# Allegro board MB1136_BOOSTPACK_V10A.brd
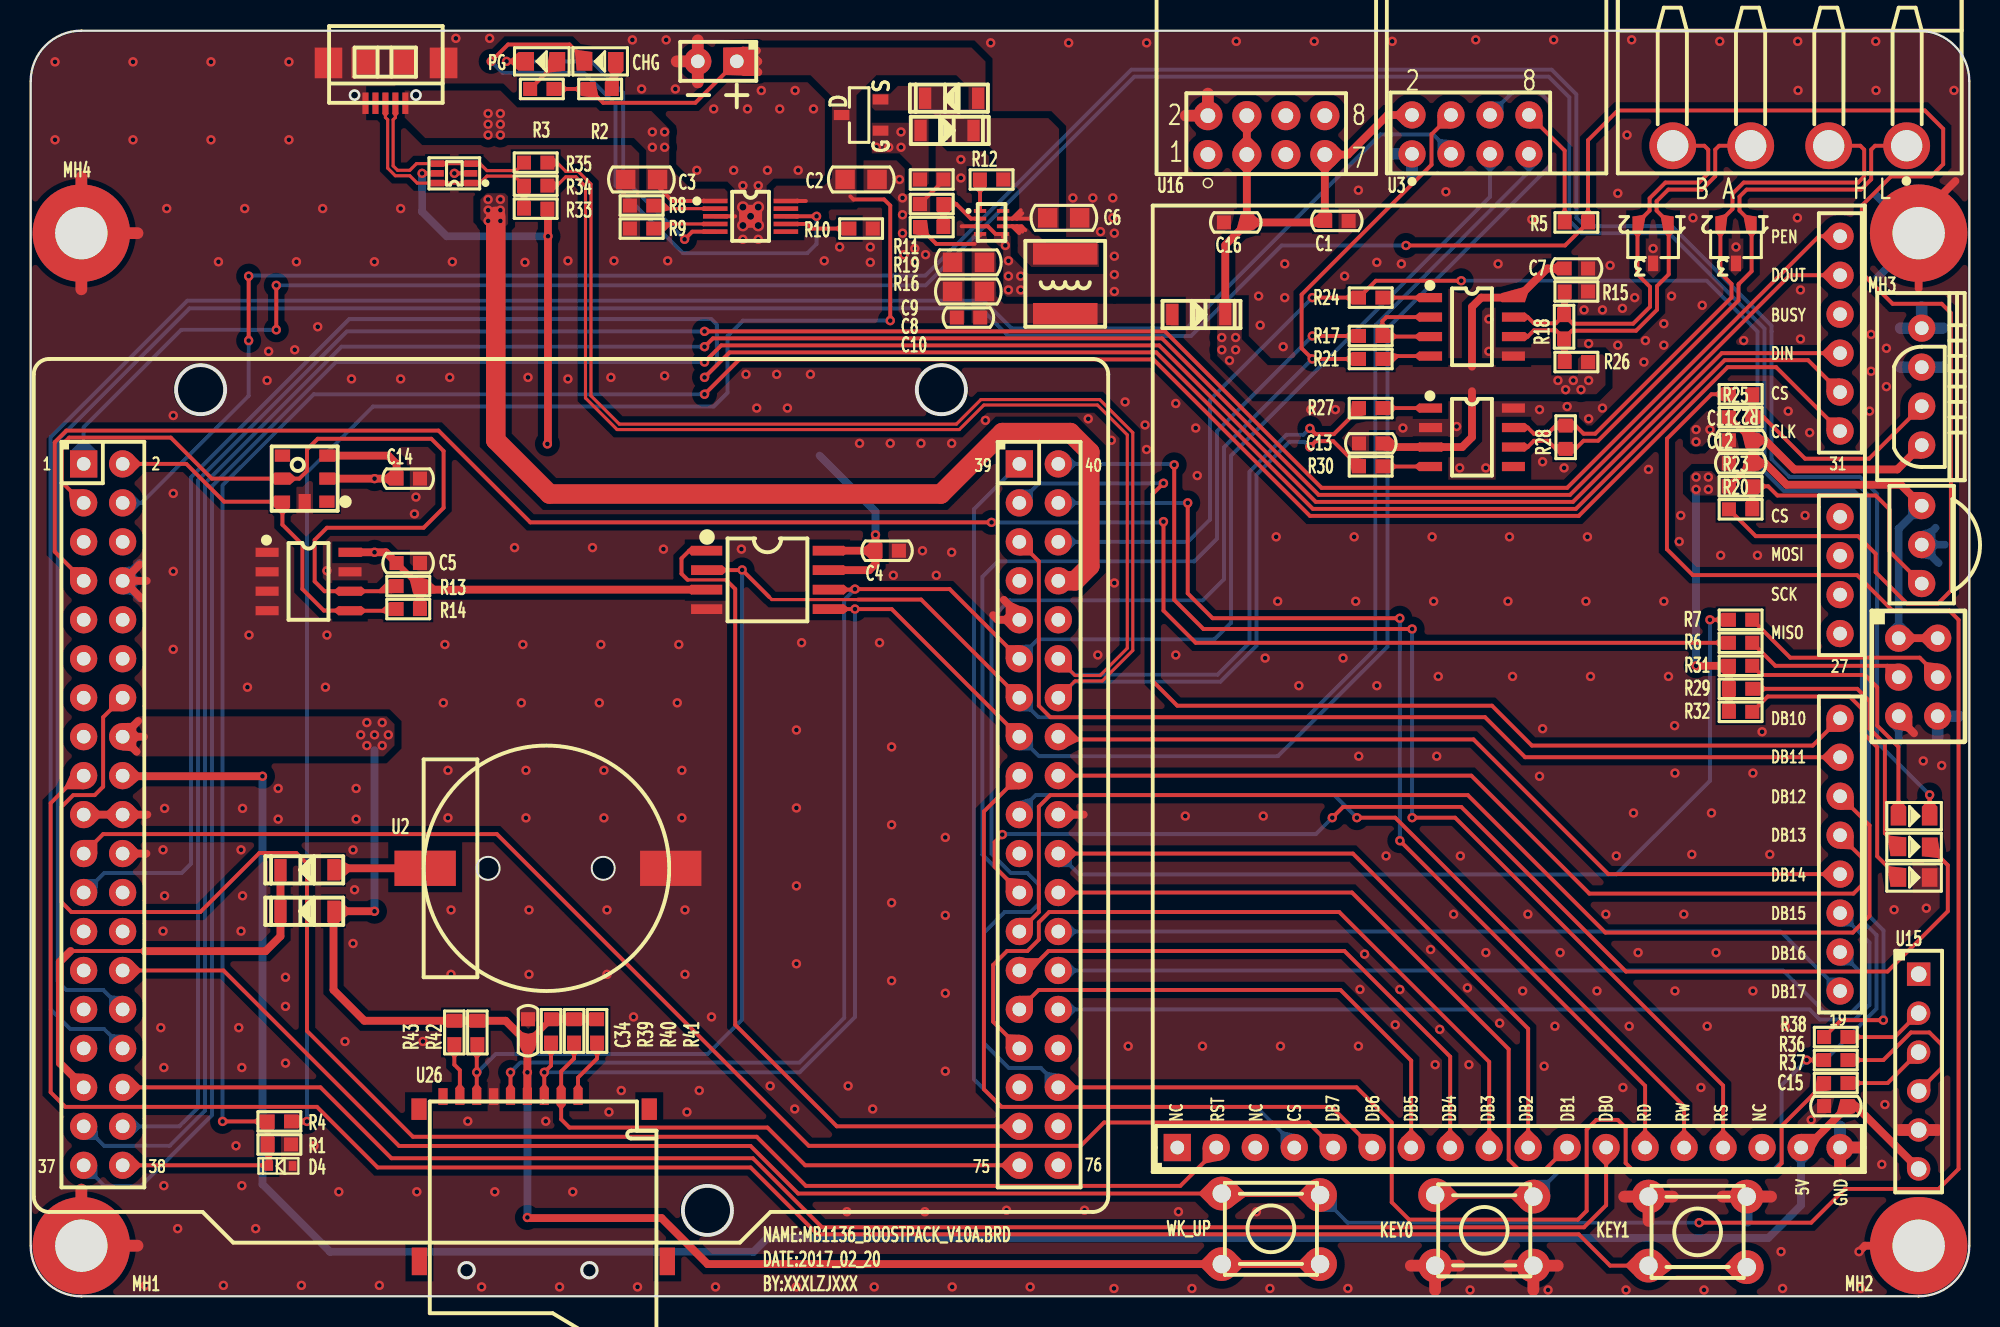
[diagram p0: board, top side]
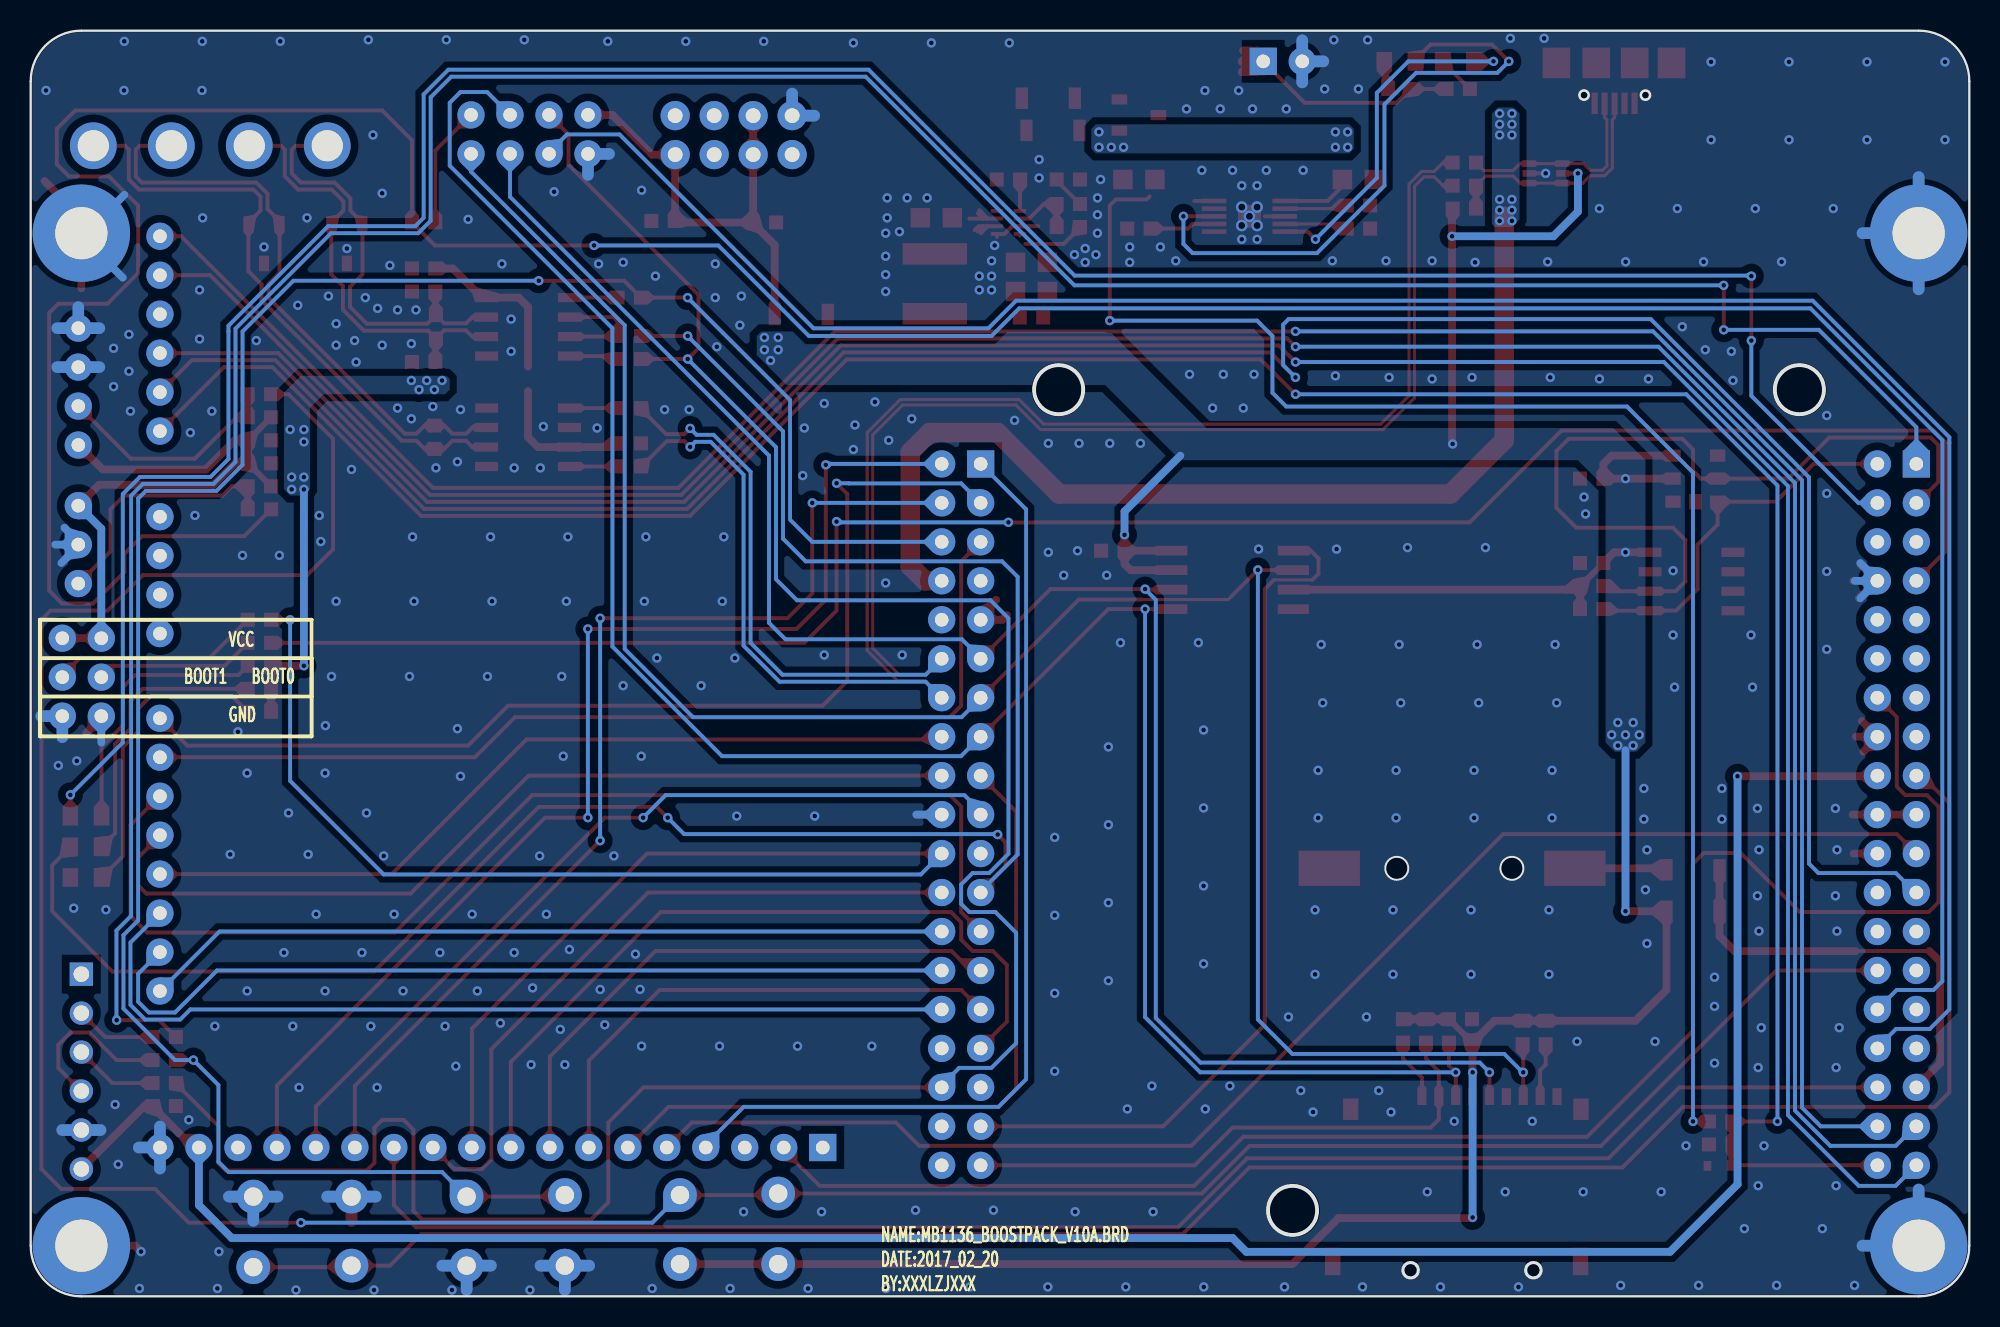
[diagram p1: board, bottom side, seen from below]

Outline 126.3 x 82.5 mm; copper layers: TOP, BOTTOM. Coordinates in mm from the lower left corner of the outline.
Outline path: 0,79.2 0,3.3 arc(0.97,0.97) 3.3,0 123,0 arc(125.33,0.97) 126.3,3.3 126.3,79.2 arc(125.33,81.53) 123,82.5 3.3,82.5 arc(0.97,81.53) 0,79.2

## Design rules (mm)
net group CAN-DP1: nets CAN_RX CAN_TX
net group DP1: nets 485_A 485_B
net group DP2: nets CAN_H CAN_L
net group USB-DP0: nets N16769643 N16789003
nets with their own width: min track width 0.254; nets VCC_5V

## Placement (name value [footprint] x y rotation side)
BAT1  BATTERY  [HEADER2X1_2R54]  46 80.5 180 top
C1  0.1uF_50V  [CC0603]  85.1 70.1 180 top
C2  10uF_25V  [CC0805]  54.1 72.8 0 top
C3  10uF_25V  [CC0805]  39.8 72.8 180 top
C4  0.1uF_50V  [CC0603]  55.8 48.6 180 top
C5  0.1uF_50V  [CC0603]  24.6 47.8 180 top
C6  10uF_25V  [CC0805]  67.3 70.3 0 top
C7  0.1uF_50V  [CC0603]  100.7 67 0 top
C8  10uF_25V  [CC0805]  61.1 65.5 180 top
C9  10uF_25V  [CC0805]  61.1 67.4 180 top
C10  0.1uF_50V  [CC0603]  61.1 63.8 180 top
C11  0.1uF_50V  [CC0603]  111.4 55.8 0 top
C12  0.1uF_50V  [CC0603]  111.4 54.3 0 top
C13  0.1uF_50V  [CC0603]  87.3 55.6 0 top
C14  0.1uF_50V  [CC0603]  24.6 53.3 180 top
C15  0.1uF_50V  [CC0603]  117.6 12.4 0 top
C16  0.1uF_50V  [CC0603]  78.5 70 0 top
C34  0.1uF_50V  [CC0603]  32.4 17.3 90 top
D1  MBR0520_SOD123  [SOD123]  19.6 25.1 180 top
D2  MBR0520_SOD123  [SOD123]  19.6 27.8 180 top
D3  LED_RED  [LED0805]  37.1 80.5 180 top
D4  PESD3V3SIUB  [SOD523]  16.3 8.5 0 top
D5  LED_GREEN  [LED0805]  33.3 80.5 180 top
D6  LMBR120FT1G_SOD-123  [SOD-123]  61.6 78.1 180 top
D7  LMBR120FT1G_SOD-123  [SOD-123]  58.1 76 0 top
D8  LMBR120FT1G_SOD-123  [SOD-123]  74.5 64 0 top
D9  LED_RED  [LED0805]  122.7 29.3 0 top
D10  LED_RED  [LED0805]  122.7 31.3 0 top
D11  LED_RED  [LED0805]  122.7 27.3 0 top
J1  -  [HEADER3X2_2R54]  121.7 42.9 270 top
J2  WJ2EDGRC-5.08-4P  [WJ2EDGRC-5R08-4P]  114.6 75 180 top
L1  SWPA5020S1R5MT  [L5020]  67.4 66 270 top
MH1  Hold  [HOLD250D134]  3.3 3.3 0 top
MH2  Hold  [HOLD250D134]  123 3.3 0 top
MH3  Hold  [HOLD250D134]  123 69.3 0 top
MH4  Hold  [HOLD250D134]  3.3 69.3 0 top
NOREF  -  []  0 5.7 0 top
NOREF#2  -  []  8.2 0 90 top
Q1  AO3401A_SOT23_PMOS  [SOT23_GSD]  54.1 77 90 top
R1  200K  [RC0603]  16.2 9.9 180 top
R2  1.5K  [RC0603]  37.1 78.7 180 top
R3  1.5K  [RC0603]  33.3 78.7 0 top
R4  200K  [RC0603]  16.2 11.4 0 top
R5  1K  [RC0603]  100.7 70 180 top
R6  10K  [RC0603]  111.4 42.6 0 top
R7  10K  [RC0603]  111.4 44.1 180 top
R8  1K  [RC0603]  39.8 71.1 180 top
R9  2K  [RC0603]  39.8 69.6 180 top
R10  10K  [RC0603]  54.1 69.6 0 top
R11  100K  [RC0603]  58.7 72.8 0 top
R12  0R  [RC0603]  62.6 72.8 180 top
R13  4.7K  [RC0603]  24.6 46.3 180 top
R14  4.7K  [RC0603]  24.6 44.8 180 top
R15  4.7K  [RC0603]  100.7 65.5 0 top
R16  200K  [RC0603]  58.7 69.7 0 top
R17  0R/NI  [RC0603]  87.3 62.6 180 top
R18  120R  [RC0603]  99.9 63.2 90 top
R19  44.2K  [RC0603]  58.7 71.2 180 top
R20  0R/NI  [RC0603]  111.4 51.3 0 top
R21  0R/NI  [RC0603]  87.3 61.1 180 top
R22  0R/NI  [RC0603]  111.4 58.8 180 top
R23  4.7K  [RC0603]  111.4 52.8 0 top
R24  0R/NI  [RC0603]  87.3 65.1 180 top
R25  4.7K  [RC0603]  111.4 57.3 0 top
R26  4.7K  [RC0603]  100.7 60.9 180 top
R27  0R/NI  [RC0603]  87.3 57.9 180 top
R28  120R  [RC0603]  100 56 90 top
R29  510R  [RC0603]  111.4 39.6 0 top
R30  0R/NI  [RC0603]  87.3 54.1 180 top
R31  510R  [RC0603]  111.4 41.1 0 top
R32  510R  [RC0603]  111.4 38.1 0 top
R33  1.5K  [RC0603]  32.9 70.9 180 top
R34  22R  [RC0603]  32.9 72.4 180 top
R35  22R  [RC0603]  32.9 73.9 180 top
R36  0R/NI  [RC0603]  117.6 15.4 0 top
R37  0R/NI  [RC0603]  117.6 13.9 0 top
R38  0R/NI  [RC0603]  117.6 16.9 0 top
R39  4.7K  [RC0603]  33.9 17.3 90 top
R40  4.7K  [RC0603]  35.4 17.3 90 top
R41  4.7K  [RC0603]  36.9 17.3 90 top
R42  4.7K  [RC0603]  29.1 17.2 270 top
R43  4.7K  [RC0603]  27.6 17.2 270 top
SW1  KEY  [SW-6X6X6]  80.8 4.4 90 top
SW2  KEY  [SW-6X6X6]  94.7 4.3 90 top
SW3  KEY  [SW-6X6X6]  108.6 4.2 270 top
TFT1  2.4TFT  [TFT_2_4]  73.1 8.1 0 top
U1  -  [NUCLEO-F446RE]  0.2 61.1 0 top
U2  BATTERY  [CR1220]  33.7 27.9 180 top
U3  -  [NRF24L01PACK]  95.45 85.57 0 top
U4  BQ24090DGQR  [HVSSOP-10]  46.9 70.4 270 top
U5  W25Q128FVSIG  [SOIC-8_208]  48 46.7 270 top
U6  MP2162GQH-Z  [QFN-8]  62.6 70 0 top
U7  AT24C512C-SSHM-T  [SOIC8]  18.1 46.6 270 top
U8  DHT11&DS18B20  [DHT11]  123.2 59.3 90 top
U9  -  [HS0038B]  123.2 49 90 top
U10  MAX3485ESA  [SOIC8]  93.9 63.2 270 top
U11  PESD1CAN  [SOT23-3]  105.7 68.6 180 top
U12  SN65HVD230DR  [SOIC8]  93.9 56 270 top
U13  PESD1CAN  [SOT23-3]  111.1 68.6 180 top
U14  -  [BMP180]  19.3 51.8 90 top
U15  ATK MODULE  [ATK-MODULE]  123 21 270 top
U16  -  [ESP8266PACK]  76.69 74.42 0 top
U25  NUP4202W1T2G  [SOT-363]  27.6 73.2 90 top
U26  -  [TFCARD]  33.4 12.7 0 top
USB1  -  [USB-MICRO]  23.1 77.7 180 top

## Library data of the parts
BAT1 U2 = BATTERY
C1 C4 C5 C7 C10-C16 C34 = CAP NP
C2 C3 C6 C8 C9 = CAP NP_2
D1 D2 D6-D8 = DIODE13_0
D3 D5 D9-D11 = LED_4
D4 = PESD3V3S1UB_1
J1 = CONN RCPT 3x2
J2 = WJ2EDGRC-5.08-4P
L1 = IND_BEAD_0805_600OHM_1
MH1-MH4 = Hold_1
Q1 = MOS-P
R1-R4 R6-R43 = R_Generic
R5 = R_10k_0603
SW1-SW3 = SWITCH-SPST-4P
TFT1 = 2_1.4TFT
U1 = NUCLEO-F446RE
U3 = NRF24L01PACK
U4 = BQ24090
U5 = W25Qxx
U6 = MP2162GQH-Z
U7 = AT24C512
U8 = DHT11_0
U9 = HS0038
U10 = MAX3485ESA
U11 U13 = PESD1CAN
U12 = TJA1050
U14 = BMP180
U15 = ATK MODULE
U16 = ESP8266PACK
U25 = nup2202w1_D_2
U26 = TFCARD_1
USB1 = USB-MICRO

## Footprints (pads in the part's own frame, mm; a bottom-side part is the same pattern mirrored in y, then rotated)
ATK-MODULE
  rect 1.524x1.524 hole 1.016: 1(0,0)
  round 1.524 hole 1.016: 2(2.54,0) 3(5.08,0) 4(7.62,0) 5(10.16,0) 6(12.7,0)
BMP180
  rect 0.8x1 smd: 1(0,0) 2(1.5,0) 3(3,0) 4(3,2.9) 5(1.5,2.9) 6(0,2.9)
  rect 1x0.8 smd: 7(0,1.45)
CC0603
  rect 0.914x0.914 smd: 1(-0.762,0) 2(0.762,0)
CC0805
  rect 1.27x1.27 smd: 1(-1.041,0) 2(1.041,0)
CR1220
  rect 4x2.3 smd: 1(8,0) 2(-8,0)
DHT11
  round 1.778 hole 0.889: 1(-3.81,0) 2(-1.27,0) 3(1.27,0) 4(3.81,0)
ESP8266PACK
  round 1.905 hole 0.965: 1(0,0) 2(0,2.54) 3(2.54,0) 4(2.54,2.54) 5(5.08,0) 6(5.08,2.54) 7(7.62,0) 8(7.62,2.54)
HEADER2X1_2R54
  rect 1.778x1.778 hole 0.889: 1(0,0)
  round 1.778 hole 0.889: 2(2.54,0)
HEADER3X2_2R54
  round 1.778 hole 0.889: 1(0,0) 2(0,2.54) 3(2.54,0) 4(2.54,2.54) 5(5.08,0) 6(5.08,2.54)
HOLD250D134
  round 6.35 hole 3.404: 1(0,0)
HS0038B
  round 1.778 hole 0.889: 1(-2.54,0) 2(0,0) 3(2.54,0)
HVSSOP-10
  rect 0.3x1.6 smd: 1(-1,-2.3) 2(-0.5,-2.3) 3(0,-2.3) 4(0.5,-2.3) 5(1,-2.3) 6(1,2.3) 7(0.5,2.3) 8(0,2.3) 9(-0.5,2.3) 10(-1,2.3)
  rect 1.5x1.5 smd: 11(0,0)
L5020
  rect 1.4x4.2 smd: 1(-1.95,0) 2(1.95,0)
LED0805
  rect 1.016x1.219 smd: 1(-1.016,0) 2(1.016,0)
NRF24L01PACK
  round 1.778 hole 0.889: 1(-5.46,-11.1) 2(-5.46,-8.56) 3(-2.92,-11.1) 4(-2.92,-8.56) 5(-0.38,-11.1) 6(-0.38,-8.56) 7(2.16,-11.1) 8(2.16,-8.56)
NUCLEO-F446RE
  rect 1.778x1.778 hole 0.889: 1(3.25,-6.84) 39(64.21,-6.84)
  round 1.778 hole 0.889: 2(5.79,-6.84) 3(3.25,-9.38) 4(5.79,-9.38) 5(3.25,-11.92) 6(5.79,-11.92) 7(3.25,-14.46) 8(5.79,-14.46) 9(3.25,-17) 10(5.79,-17) 11(3.25,-19.54) 12(5.79,-19.54) 13(3.25,-22.08) 14(5.79,-22.08) 15(3.25,-24.62) 16(5.79,-24.62) 17(3.25,-27.16) 18(5.79,-27.16) 19(3.25,-29.7) 20(5.79,-29.7) 21(3.25,-32.24) 22(5.79,-32.24) 23(3.25,-34.78) 24(5.79,-34.78) 25(3.25,-37.32) 26(5.79,-37.32) 27(3.25,-39.86) 28(5.79,-39.86) 29(3.25,-42.4) 30(5.79,-42.4) 31(3.25,-44.94) 32(5.79,-44.94) 33(3.25,-47.48) 34(5.79,-47.48) 35(3.25,-50.02) 36(5.79,-50.02) 37(3.25,-52.56) 38(5.79,-52.56) 40(66.75,-6.84) 41(64.21,-9.38) 42(66.75,-9.38) 43(64.21,-11.92) 44(66.75,-11.92) 45(64.21,-14.46) 46(66.75,-14.46) 47(64.21,-17) 48(66.75,-17) 49(64.21,-19.54) 50(66.75,-19.54) 51(64.21,-22.08) 52(66.75,-22.08) 53(64.21,-24.62) 54(66.75,-24.62) 55(64.21,-27.16) 56(66.75,-27.16) 57(64.21,-29.7) 58(66.75,-29.7) 59(64.21,-32.24) 60(66.75,-32.24) 61(64.21,-34.78) 62(66.75,-34.78) 63(64.21,-37.32) 64(66.75,-37.32) 65(64.21,-39.86) 66(66.75,-39.86) 67(64.21,-42.4) 68(66.75,-42.4) 69(64.21,-44.94) 70(66.75,-44.94) 71(64.21,-47.48) 72(66.75,-47.48) 73(64.21,-50.02) 74(66.75,-50.02) 75(64.21,-52.56) 76(66.75,-52.56)
QFN-8
  rect 0.8x0.25 smd: 1(-0.75,0.75) 2(-0.75,0.25) 3(-0.75,-0.25) 4(-0.75,-0.75) 5(0.75,-0.75) 6(0.75,-0.25) 7(0.75,0.25) 8(0.75,0.75)
RC0603
  rect 0.914x0.914 smd: 1(-0.762,0) 2(0.762,0)
SOD123
  rect 0.8x1.4 smd: 1(-0.127,0) 2(3.327,0)
SOD523
  rect 0.508x0.635 smd: 1(0.762,0) 2(-0.762,0)
SOD-123
  rect 0.8x1.4 smd: 1(-0.127,0) 2(3.327,0)
SOIC8
  rect 0.6x1.5 smd: 1(-1.9,-2.7) 2(-0.63,-2.7) 3(0.64,-2.7) 4(1.91,-2.7) 5(1.91,2.7) 6(0.64,2.7) 7(-0.63,2.7) 8(-1.9,2.7)
SOIC-8_208
  rect 0.635x2.032 smd: 1(-1.905,-3.962) 2(-0.635,-3.962) 3(0.635,-3.962) 4(1.905,-3.962) 5(1.905,3.962) 6(0.635,3.962) 7(-0.635,3.962) 8(-1.905,3.962)
SOT23-3
  rect 0.66x1.016 smd: 1(-1.016,-1.27) 2(1.016,-1.27) 3(0,1.27)
SOT23_GSD
  rect 0.66x1.016 smd: 1(-1.016,-1.27) 2(1.016,-1.27) 3(0,1.27)
SOT-363
  rect 0.432x0.813 smd: 1(-0.635,-1.092) 2(0,-1.092) 3(0.635,-1.092) 4(0.635,1.092) 5(0,1.092) 6(-0.635,1.092)
SW-6X6X6
  round 2.2 hole 1.2: 1(-2.3,3.2) 2(-2.3,-3.2) 3(2.3,3.2) 4(2.2,-3.2)
TFCARD
  rect 0.6x1.1 smd: 1(2.26,0.32) 2(1.16,0.32) 3(0.06,0.32) 4(-1.04,0.32) 5(-2.14,0.32) 6(-3.24,0.32) 7(-4.34,0.32) 8(-5.44,0.32) 9(-6.54,0.32)
  rect 1x1.4 smd: 10(-8.1,-0.5) 13(6.9,-0.5)
  rect 1x1.8 smd: 11(-8.074,-10.422) 12(8.074,-10.422)
TFT_2_4
  rect 1.778x1.778 hole 0.889: 1(1.6,1.6)
  round 1.778 hole 0.889: 2(4.14,1.6) 3(6.68,1.6) 4(9.22,1.6) 5(11.76,1.6) 6(14.3,1.6) 7(16.84,1.6) 8(19.38,1.6) 9(21.92,1.6) 10(24.46,1.6) 11(27,1.6) 12(29.54,1.6) 13(32.08,1.6) 14(34.62,1.6) 15(37.16,1.6) 16(39.7,1.6) 17(42.24,1.6) 18(44.78,1.6) 19(44.78,11.8) 20(44.78,14.34) 21(44.78,16.88) 22(44.78,19.42) 23(44.78,21.96) 24(44.78,24.5) 25(44.78,27.04) 26(44.78,29.58) 27(44.78,35.1) 28(44.78,37.64) 29(44.78,40.18) 30(44.78,42.72) 31(44.78,48.3) 32(44.78,50.84) 33(44.78,53.38) 34(44.78,55.92) 35(44.78,58.46) 36(44.78,61)
USB-MICRO
  rect 0.4x1.4 smd: 1(-1.31,-0.07) 2(-0.66,-0.07) 3(-0.01,-0.07) 4(0.64,-0.07) 5(1.29,-0.07)
  rect 1.8x2 smd: 6(-3.8,-2.7) 7(-1.2,-2.7) 8(1.3,-2.7) 9(3.7,-2.7)
WJ2EDGRC-5R08-4P
  round 3.048 hole 2.032: 1(-7.62,0) 2(-2.54,0) 3(2.54,0) 4(7.62,0)

## Nets
AGND: U1.70(AGND)
GND: BAT1.2 C1.1 C2.2 C3.2 C4.1 C5.1 C6.2 C7.2 C8.2 C9.2 C10.2 C11.1 C12.1 C13.1 C14.1 C15.1 C16.1 C34.2 D4.1 D11.2(CATHODE) J1.5 J1.6 MH1.1 MH2.1 MH3.1 MH4.1 R1.1 R8.2 R9.2 R10.2 R11.2 R15.2 R19.2 SW2.1 SW2.2 SW3.1 SW3.2 TFT1.18(GND) U1.8(GND_1) U1.19(GND_2) U1.20(GND_3) U1.22(GND_4) U1.47(GND_5) U1.58(GND_6) U2.2 U3.1(GND) U4.3(VSS) U4.11(GND) U5.4(GND) U6.3(AGND) U6.5(PGND) U7.1(A0) U7.2(A1) U7.3(A2) U7.4(GND) U7.7(WP) U8.3(NC) U8.4(GND) U9.2(GND) U10.5(GND) U11.3 U12.2(GND) U12.8(RS) U13.3 U14.7(GND) U15.5(GND) U16.2(GND) U25.2 U26.6(GND) USB1.5(GND) USB1.6(P_2) USB1.7(P_1) USB1.8(P_3) USB1.9(P_4)
VBAT: BAT1.1 C2.1 D6.1 Q1.3(D) R2.2 R3.2 R4.2 U4.10(OUT)
VCC_3V3: C1.2 C4.2 C5.2 C7.1 C11.2 C12.2 C13.2 C14.2 C16.2 C34.1 D1.1 D8.2 J1.1 J1.2 R13.1 R14.1 R23.1 R25.1 R26.1 R29.1 R31.1 R32.1 R33.1 R39.2 R40.2 R41.2 R42.1 R43.1 SW1.1 SW1.2 U1.16(3V3) U3.2(VCC) U5.3(W\P\) U5.7(H\O\L\D\) U5.8(VCC) U7.8(VCC) U8.1(VCC) U9.3(VCC) U10.8(VCC) U12.3(VCC) U14.2(VDD) U14.3(VDDIO) U16.3(CH_PD) U16.4(GPIO2) U16.7(VCC) U25.5 U26.4(VCC)
VCC_5V: C15.2 TFT1.17(5V) U1.18(5V) U15.6(VCC)
VCC_AVDD: U1.45(AVDD)
VCC_DCDC: C6.1 D6.2 D7.2 Q1.2(S) R12.1 U6.7(VIN)
VCC_E5V: U1.6(E5V)
VCC_U5V: C3.1 D7.1 Q1.1(G) R11.1 U1.46(U5V) U4.1(IN) USB1.1(VBUS)
VCC_VBAT: D1.2 D2.2 U1.33(VBAT)
VCC_VDD: U1.5(VDD)
VCC_VIN: U1.24(VIN)
18B20_DQ: R22.1 R25.2 U8.2(DQ)
485_A: J2.3 R18.1 R26.2 U10.6(A) U11.1
485_B: J2.4 R15.1 R18.2 U10.7(B) U11.2
ADC_BAT: D4.2 R1.2 R4.1 TFT1.31(CLK) U1.38(PC0)
BAT_#CHG: D3.2(CATHODE) U4.8(C\H\G\)
BAT_#PG: D5.2(CATHODE) U4.5(P\G\)
BOOT0: R6.1 U1.7(BOOT0)
BOOT1: R7.2 TFT1.10(DB2) U1.60(PB2)
CAN_H: J2.2 R28.2 U12.7(CANH) U13.2
CAN_L: J2.1 R28.1 U12.6(CANL) U13.1
CAN_RX: R30.2 R35.1 U1.52(PA11)
CAN_TX: R27.2 R34.1 U1.50(PA12)
F_CS: U1.73(PA2) U5.1(C\S\)
GPS_PPS: R38.1 U1.1(PC10)
IIC_SCL: R13.2 U1.3(PC12) U7.6(SCL) U14.5(SCL)
IIC_SDA: R14.2 U1.2(PC11) U7.5(SDA) U14.6(SDA)
KEY0: R24.2 R36.1 SW2.3 SW2.4 U1.44(PC5)
KEY1: SW3.3 SW3.4 U1.17(PA15)
LCD_CS: TFT1.4(CS_1) U1.39(PC9)
LCD_D0: TFT1.12(DB0) U1.34(PB0)
LCD_D1: TFT1.11(DB1) U1.62(PB1)
LCD_D3: TFT1.9(DB3) U1.69(PB3)
LCD_D4: TFT1.8(DB4) U1.65(PB4)
LCD_D5: TFT1.7(DB5) U1.67(PB5)
LCD_D6: TFT1.6(DB6) U1.55(PB6)
LCD_D7: TFT1.5(DB7) U1.21(PB7)
LCD_D8: TFT1.26(DB10) U1.41(PB8)
LCD_D9: TFT1.25(DB11) U1.43(PB9)
LCD_D10: TFT1.24(DB12) U1.63(PB10)
LCD_D11: TFT1.23(DB13) U1.56(NC_6)
LCD_D12: TFT1.22(DB14) U1.54(PB12)
LCD_D13: TFT1.21(DB15) U1.68(PB13)
LCD_D14: TFT1.20(DB16) U1.66(PB14)
LCD_D15: TFT1.19(DB17) U1.64(PB15)
LCD_RD: TFT1.13(RD) U1.42(PC6)
LCD_RS: TFT1.15(RS) U1.40(PC8)
LCD_RW: TFT1.14(RW) U1.57(PC7)
LED0: D9.2(CATHODE) R17.2 U1.61(PA8)
LED1: D10.2(CATHODE) U1.4(PD2)
NRF_CE: U1.32(PA4) U3.3(CE)
NRF_CS: R21.2 R37.1 U1.72(PC4) U3.4(CSN)
NRF_IRQ: R5.1 R20.1 U1.30(PA1)
PA9: U1.59(PA9)
PA10: U1.71(PA10)
REMOTE_IN: R20.2 R23.2 U9.1(DATA)
RESET: TFT1.2(RST) U1.14(RESET)
SD_CS: R40.1 U1.75(PA3) U26.2(DAT3)
SPI1_MISO: R42.2 U1.51(PA6) U3.7(MISO) U5.2(DO) U26.7(DAT0)
SPI1_MOSI: R39.1 U1.53(PA7) U3.6(MOSI) U5.5(DI) U26.3(CMD)
SPI1_SCK: U1.49(PA5) U3.5(SCK) U5.6(CLK) U26.5(CLK)
T_CS: TFT1.32(CS) U1.23(PC13)
T_MISO: TFT1.35(DOUT) U1.35(PC2)
T_MOSI: TFT1.33(DIN) U1.37(PC3)
T_PEN: TFT1.36(PENIRQ) U1.36(PC1)
U3_RXD: U16.1(TXD)
U3_TXD: U16.8(RXD)
WK_UP: R22.2 SW1.3 SW1.4 U1.28(PA0)
N16760053: D9.1(ANODE) R29.2
N16760057: D10.1(ANODE) R31.2
N16760125: D11.1(ANODE) R32.2
N16761108: R5.2 U3.8(IRQ)
N16762865: R17.1 U10.2(R\E\) U10.3(DE)
N16769643: R33.2 R34.2 U25.1 U25.6 USB1.3(D+)
N16774261: R27.1 U12.1(D)
N16774305: R30.1 U12.4(R)
N16775020: R24.1 U10.1(RO)
N16775096: R21.1 U10.4(DI)
N16776719: R10.1 U4.7(ISET2)
N16776893: R8.1 U4.2(ISET)
N16776901: R9.1 U4.4(PRETERM)
N16777207: D5.1(ANODE) R3.1
N16777228: D3.1(ANODE) R2.1
N16778010: C8.1 C9.1 C10.1 D8.1 L1.2(B) R16.1 U6.4(OUT)
N16778038: R12.2 U6.1(EN)
N16778054: L1.1(A) U6.6(SW)
N16778074: R16.2 R19.1 U6.2(FB)
N16781181: R36.2 U15.4(TXD)
N16781184: R37.2 U15.3(RXD)
N16781187: R38.2 U15.2(KEY)
N16789003: R35.2 U25.3 U25.4 USB1.2(D-)
N16789326: R43.2 U26.8(DAT1)
N16789342: R41.1 U26.1(DAT2)
N167502100: D2.1 U2.1
N167508310: J1.4 R7.1
N167508315: J1.3 R6.2

Pads without a net: TFT1 1 3 16 27 28 29 30 34; U1 9 10 11 12 13 15 25 26 27 29 31 48 74 76; U4 6 9; U6 8; U12 5; U14 1 4; U15 1; U16 5 6; U26 9 10 11 12 13; USB1 4

## Via types
v1: diameter 0.61, hole 0.305, TOP to BOTTOM, 488 vias
v2: diameter 0.762, hole 0.457, TOP to BOTTOM, 5 vias

## Routing (per net, layer and track width the routed paths; a pad name or vN(x,y) marks a point on that pad's centre or on a via; arc(x,y) is an arc through that point)
GND: length 167
  TOP w0.254: R11.2 59.46,72.72 R19.2 ; 63.35,69.05 U6.5 62.86,69.25 62.36,69.75 U6.3 60.65,69.75 ; U25.2 v1(27.6,73.2) ; U4.3 45.9,70.4
  TOP w0.508: 6.04,46.64 U1.8 ; 6.04,46.64 7.1,47.7 ; 6.04,46.64 6.06,46.64 ; MH2.1 119.5,3.3 v1(119.12,2.91) ; U1.19 U1.20 7.6,31.4 ; 62.7,44.4 63,44.1 U1.47 64.41,44.39 63.4,45.4 ; U1.22 7.54,28.86 ; 122.7,36.7 121.7,37.7 J1.5 ; 6.06,46.64 7.56,46.64 ; 6.06,46.64 7.2,45.5 ; U1.58 68.6,31.4 ; 125.4,72.7 123,70.3 MH3.1 123,65.7
  TOP w0.762: 3.3,6.96 MH1.1 6.96,3.3 ; 103.82,6.5 SW3.2 ; SW3.2 106.98,6.5 ; SW3.2 105.4,4.92 ; 110.22,6.5 SW3.1 113.38,6.5 ; SW2.1 93.08,2 ; SW2.1 89.92,2 ; SW2.1 91.5,0.42 ; 97.9,0.42 SW2.2 ; SW2.2 99.48,2 ; SW2.2 96.32,2 ; 42.09,80.5 BAT1.2 ; BAT1.2 43.46,79.13 ; BAT1.2 43.46,81.87 ; 75.26,76.96 U16.2 76.69,78.4 ; 121.76,10.84 U15.5 124.24,10.84 ; 3.3,65.64 MH4.1 ; MH4.1 3.3,72.96 ; MH4.1 6.96,69.3 ; 117.88,8.33 TFT1.18 119.25,9.7
  BOTTOM w0.508: U1.8 7.46,46.64 ; U1.8 5.99,46.69 7.1,47.8 ; U1.8 5.99,46.61 7.1,45.5 ; U9.2 124.7,49 ; U9.2 123.2,48.9 124.3,47.8 ; U9.2 123.2,49.2 124.1,50.1 ; 120.2,71.8 122.7,69.3 MH3.1 123,69.1 120.3,66.4 ; J1.5 121.7,36.1 ; U1.58 68.6,31.4
  BOTTOM w0.762: 106.98,6.5 SW3.2 103.82,6.5 ; MH4.1 3.3,72.96 ; MH4.1 6.96,69.3 ; MH4.1 3.3,65.64 ; 76.69,78.4 U16.2 75.26,76.96 ; U8.4 123.2,64.48 ; U8.4 124.57,63.11 ; U8.4 121.83,63.11 ; 125.61,37.82 J1.6 124.24,36.45 ; 89.92,2 SW2.1 ; SW2.1 91.5,0.42 ; SW2.1 93.08,2 ; TFT1.18 119.25,9.7 ; TFT1.18 117.88,11.07 ; TFT1.18 117.88,8.33 ; 96.32,2 SW2.2 ; SW2.2 99.48,2 ; SW2.2 97.9,0.42 ; 89.99,73.1 U3.1 88.62,74.47 ; 42.09,80.5 BAT1.2 ; BAT1.2 43.46,79.13 ; BAT1.2 43.46,81.87 ; 110.22,6.5 SW3.1 ; SW3.1 111.8,4.92 ; SW3.1 113.38,6.5 ; 124.24,10.84 U15.5 121.76,10.84 ; 124.57,60.57 U8.3 121.83,60.57 ; 6.96,3.3 MH1.1 3.3,6.96
  vias: v1(1.58,80.47) v1(1.58,75.39) v1(6.66,80.47) v1(6.66,75.39) v1(7.48,0.71) v1(8.48,17.51) v1(8.62,29.11) v1(8.62,23.81) v1(8.72,31.81) v1(8.72,26.11) v1(8.68,14.91) v1(8.68,7.21) v1(8.86,70.91) v1(9.29,57.42) v1(9.29,52.34) v1(9.29,47.26) v1(9.29,42.18) v1(9.58,4.41) v1(11.74,80.47) v1(11.74,75.39) v1(12.23,67.44) v1(12.56,0.71) v1(13.38,9.81) v1(13.56,17.51) v1(13.7,29.11) v1(13.7,23.81) v1(13.8,31.81) v1(13.8,26.11) v1(13.76,14.91) v1(13.76,7.21) v1(13.94,70.91) v1(14.12,39.71) v1(14.22,43.11) v1(14.66,4.41) v1(15.4,59.7) v1(15.5,61.6) v1(16.12,33.11) v1(16.12,31.11) v1(16.6,20.8) v1(16.6,18.9) v1(16.6,15.2) v1(16.82,80.47) v1(16.82,75.39) v1(17.2,61.7) v1(17.31,67.44) v1(17.64,0.71) v1(18.46,9.81) v1(18.7,63.2) v1(19.02,70.91) v1(19.2,39.71) v1(19.3,47.3) v1(19.3,43.11) v1(20.08,6.81) v1(20.48,16.61) v1(20.9,59.8) v1(21,29.1) v1(21,23) v1(21.1,26.5) v1(21.2,33.11) v1(21.2,31.11) v1(22.39,67.44) v1(22.72,0.71) v1(24.1,70.91) v1(24.1,59.8) v1(25,51) v1(25.1,52.1) v1(25.16,6.81) v1(25.56,16.61) v1(26.88,38.69) v1(26.98,42.49) v1(27.18,34.29) v1(27.18,31.19) v1(27.3,59.9) v1(27.38,25.19) v1(27.38,20.99) v1(27.47,67.44) v1(27.7,82) v1(28.48,11.41) v1(29.38,0.61) v1(29.9,82) v1(30.24,6.81) v1(31.52,48.81) v1(31.96,38.69) v1(32.06,42.49) v1(32.2,67.4) v1(32.26,34.29) v1(32.26,31.19) v1(32.4,59.9) v1(32.46,25.19) v1(32.46,20.99) v1(33.56,11.41) v1(34.46,0.61) v1(35,67.5) v1(35,59.8) v1(35.32,6.81) v1(36.6,48.81) v1(37.04,38.69) v1(37.14,42.49) v1(37.34,34.29) v1(37.34,31.19) v1(37.54,25.19) v1(37.54,20.99) v1(37.68,12.01) v1(37.8,59.9) v1(38,67.5) v1(38.48,13.41) v1(39.2,81.9) v1(39.28,18.21) v1(39.54,0.61) v1(39.8,78.7) v1(41.22,48.71) v1(41.3,60) v1(41.4,81.9) v1(41.5,67.5) v1(42,78.7) v1(42.12,38.69) v1(42.22,42.49) v1(42.42,34.29) v1(42.42,31.19) v1(42.62,25.19) v1(42.62,20.99) v1(42.76,12.01) v1(43.4,73.4) v1(43.56,13.41) v1(44.36,18.21) v1(44.5,77.4) v1(44.62,0.61) v1(45.8,73.4) v1(46.3,48.71) v1(46.4,72.4) v1(46.4,68.9) v1(46.6,60.1) v1(46.7,77.4) v1(47.3,57.9) v1(47.4,72.4) v1(47.4,68.9) v1(47.6,78.6) v1(48,73.4) v1(48.18,13.71) v1(48.6,60.1) v1(48.8,77.4) v1(49.3,57.9) v1(49.8,78.6) v1(49.78,12.21) v1(49.89,36.92) v1(49.89,31.84) v1(49.89,26.76) v1(49.89,21.68) v1(49.88,0.61) v1(50,73.4) v1(50.22,42.61) v1(50.8,60.1) v1(51,77.4) v1(51.7,67.5) v1(52.7,68.4) v1(53.18,5.51) v1(53.26,13.71) v1(54,55.6) v1(54.7,68.4) v1(54.7,67.4) v1(54.86,12.21) v1(54.96,0.61) v1(55.3,42.61) v1(56,55.6) v1(56.09,35.82) v1(56.09,30.74) v1(56.09,25.66) v1(56.09,20.58) v1(56.2,47) v1(56.6,72.8) v1(56.8,71.6) v1(56.8,70.5) v1(56.8,69.3) v1(56.9,67.9) v1(57.6,68.3) v1(57.6,67.4) v1(58,55.6) v1(58.1,48.6) v1(58.3,67.9) v1(58.26,5.51) v1(59,47) v1(59.59,29.92) v1(59.59,24.84) v1(59.59,19.76) v1(59.59,14.68) v1(60,55.6) v1(60,48.5) v1(60.04,0.61) v1(60.6,74.1) v1(60.6,72.9) v1(62.2,57.1) v1(62.54,81.71) v1(63.5,68.5) v1(63.58,5.61) v1(63.7,67.5) v1(63.7,66.5) v1(63.7,65.6) v1(64.5,66.5) v1(64.5,65.6) v1(65.12,0.61) v1(67.62,81.71) v1(67.9,71.6) v1(68.66,5.61) v1(68.9,57.2) v1(69.2,71.6) v1(69.52,41.81) v1(69.7,69.4) v1(70.4,55.8) v1(70.5,71.6) v1(70.5,70.3) v1(70.6,69.3) v1(70.6,67.8) v1(70.6,66.6) v1(70.6,65.5) v1(70.6,46.5) v1(70.58,0.51) v1(71.3,58.3) v1(71.5,16.31) v1(72.6,56.8) v1(72.7,81.71) v1(72.7,55.2) v1(74.6,58.2) v1(74.6,41.81) v1(74.78,5.51) v1(75.22,31.31) v1(75.66,0.51) v1(75.9,56.6) v1(76,53.5) v1(76.34,16.31) v1(78.54,81.81) v1(79.86,5.51) v1(80,65.2) v1(80.1,63.3) v1(80.3,31.31) v1(80.42,41.61) v1(80.74,0.51) v1(81.14,49.51) v1(81.24,45.31) v1(81.42,16.31) v1(81.6,61.9) v1(81.7,67.3) v1(81.7,65.1) v1(82.62,39.81) v1(83.4,57.8) v1(83.62,81.81) v1(85,57.8) v1(85.5,41.61) v1(85.6,66.5) v1(85.82,0.51) v1(86.22,49.51) v1(86.32,45.31) v1(86.5,72.1) v1(86.52,35.21) v1(86.5,16.31) v1(86.6,20.01) v1(86.9,22.31) v1(87.7,67.4) v1(87.7,39.81) v1(88.3,28.71) v1(88.7,81.81) v1(88.9,17.7) v1(89.2,20) v1(89.3,67.3) v1(89.4,56.6) v1(91.2,22.61) v1(91.3,49.51) v1(91.4,45.31) v1(91.5,15.1) v1(91.6,35.21) v1(91.7,40.41) v1(91.8,17.4) v1(92.2,72) v1(92.7,24.91) v1(92.9,56.7) v1(93.1,54) v1(93.14,28.71) v1(93.6,20.11) v1(93.7,15.1) v1(93.78,0.41) v1(94.14,81.91) v1(94.8,54) v1(94.8,22.41) v1(95,63.7) v1(95,61.6) v1(95.6,67.3) v1(95.7,17.81) v1(96.24,45.31) v1(96.34,49.51) v1(96.54,40.41) v1(97.2,19.91) v1(97.54,24.91) v1(97.8,70.2) v1(98.3,57.8) v1(98.3,33.9) v1(98.5,54.4) v1(98.5,37) v1(98.6,15) v1(98.86,0.41) v1(99.22,81.91) v1(99.3,17.61) v1(99.64,22.41) v1(99.9,54) v1(100.1,58) v1(101.2,64.3) v1(101.32,45.31) v1(101.42,49.51) v1(101.5,62.1) v1(101.5,57.2) v1(101.62,40.41) v1(102.04,19.91) v1(102.4,64.3) v1(102.4,57.9) v1(102.62,24.91) v1(102.9,67.2) v1(103.3,28.71) v1(103.4,71.9) v1(103.4,62) v1(103.7,64.4) v1(103.74,13.61) v1(103.94,0.41) v1(104,75.7) v1(104.14,17.61) v1(104.3,81.91) v1(104.42,31.51) v1(104.5,65.1) v1(104.72,22.41) v1(105.1,60.9) v1(105.2,62.3) v1(105.4,53.9) v1(105.7,68.3) v1(106.4,63.4) v1(106.4,62) v1(106.4,45.31) v1(106.7,40.41) v1(106.9,65.2) v1(107.1,37.2) v1(107.12,34.11) v1(107.12,19.91) v1(107.4,49.2) v1(107.5,50.9) v1(107.7,24.91) v1(108.22,28.81) v1(108.3,70.3) v1(108.82,13.61) v1(108.9,64.6) v1(109.02,0.41) v1(109.22,17.61) v1(109.5,31.51) v1(109.8,22.41) v1(110.04,81.81) v1(110.1,48.3) v1(111.1,68.4) v1(111.6,62.3) v1(112.2,34.11) v1(112.2,19.91) v1(112.5,48.3) v1(112.8,36.8) v1(113.3,28.81) v1(114.04,2.91) v1(114.14,0.51) v1(114.3,17.61) v1(114.5,57.7) v1(115.12,81.81) v1(115.14,78.61) v1(115.1,70.3) v1(115.3,65.6) v1(115.3,62.4) v1(115.6,50.9) v1(115.9,56.3) v1(116,11.5) v1(119.22,0.51) v1(119.8,57.7) v1(119.9,62.7) v1(119.9,60.3) v1(120.2,81.81) v1(120.22,78.61) v1(120.6,8.6) v1(120.8,12.5) v1(120.9,61.8) v1(120.9,59.3) v1(121.4,25.2) v1(123.3,34.9) v1(123.5,25.3) v1(124.5,34.6) v1(125.3,78.61) v2(46.4,71) v2(46.4,69.8) v2(46.9,70.4) v2(47.4,71) v2(47.4,69.8)
VBAT: length 117.7
  TOP w0.254: BAT1.1 43.3,77.8 37.3,77.8 36.4,78.7 R2.2 R3.2 ; U4.10 50.5,71.4 ; R4.2 v1(18,11.4) ; 53.4,71.7 53.6,71.5 55.6,71.5 56,71.1 v1(56,63.6)
  TOP w0.508: BAT1.1 47.4,80.5 ; BAT1.1 46,80.3 46.5,79.8 47.4,79.8 ; BAT1.1 46,80.8 46.4,81.2 47.3,81.2
  BOTTOM w0.254: v1(56,63.6) 46.4,63.6 45.4,62.6 45.4,58.9 44.5,58 22.3,58 18,53.7 v1(18,11.4)
VCC_3V3: length 295.1
  TOP w0.254: U25.5 v1(25.5,73.2)
  TOP w0.4: C12.2 112.14,54.3 R23.1 ; R39.2 32.4,16.56 C34.1 ; R25.1 112.14,55.8 C11.2 ; C5.2 25.34,46.3 R13.1
  TOP w0.508: U1.16 5.99,36.41 6.9,35.5 ; U1.16 5.99,36.49 7,37.5 ; U1.16 7.38,36.48 ; R33.1 33.7,70.86 v1(33.7,69.1) 33.7,55.6 v1(33.66,55.56) ; C16.2 79.23,70.03 U16.3 U16.4 ; C16.2 84.24,70 C1.2 84.31,70.13 U16.7 85.82,74.42 88.4,77 89.98,77 U3.2 ; C16.2 79.26,69.96 77.83,68.53 D8.2 ; v1(22.4,25.1) D1.1 19.73,19.97 21.74,17.96 R43.1 R42.1 30.94,17.96 32.36,16.54 C34.1 32.36,16.5 v1(32.36,14.6) U26.4 ; C13.2 88.3,55.36 U12.3 93.26,55.36 93.9,56 93.9,59 ; R32.1 R29.1 R31.1 v1(108.5,41.1) ; SW1.2 SW1.1 44.1,2.1 41.1,5.1 32.4,5.1 v1(32.36,5.14) ; 93.9,60.6 93.9,64.5 94.5,65.1 U10.8 96.9,65.1 98.8,67 C7.1 ; R39.2 R40.2 R41.2 ; U7.8 v1(22.4,48.5) 23.14,48.5 C5.2 ; U5.7 54.63,47.34 55.04,47.74 C4.2 ; C4.2 55.03,48.6 51.96,48.6 ; C4.2 v1(55.04,49.64) ; U8.1 121.61,53.9 114.9,53.9 113,55.8 C11.2 C12.2 113,54.3 114.4,52.9 121.84,52.9 U9.3 ; U14.3 23.3,54.8 23.84,54.26 C14.2 v1(22.4,53.3) U14.2 ; R14.1 R13.1 25.6,46.06 44.04,46.06 ; J1.2 J1.1
  BOTTOM w0.508: v1(22.4,25.1) 22.4,35.6 ; v1(32.36,14.6) v1(32.36,5.14) ; v1(25.5,73.2) 25.5,70.7 27.1,69.1 v1(33.7,69.1) ; v1(108.5,41.1) v1(108.5,52.6) ; 51.4,54.8 55.04,51.16 v1(55.04,49.64) ; J1.1 121.7,50.04 U9.3
  vias: v1(21.5,36.6) v1(21.9,37.4) v1(21.9,35.9) v1(22.4,36.6) v1(22.9,37.4) v1(22.9,35.9) v1(23.3,36.6) v1(77.6,62.5) v1(77.6,61.7) v1(78.1,61) v1(78.5,62.5) v1(78.5,61.7) v1(99.5,59.7) v1(100,59.1) v1(100.5,59.7) v1(101,59.1) v1(101.5,59.7) v1(108.5,56.5) v1(108.5,55.7) v1(108.5,53.4) v1(109.3,53.4) v1(109.3,52.6) v1(109.4,56.5)
VCC_5V: length 153.3
  TOP w0.508: v1(15.1,33.9) 6.03,33.9 U1.18 ; U15.6 118.9,12.4 C15.2 118.36,12.36 115.7,9.7 TFT1.17
  BOTTOM w0.508: v1(15.1,33.9) 15.1,7.3 19.5,2.9 47.1,2.9 48,3.8 113.2,3.8 115.34,5.94 TFT1.17
VCC_DCDC: length 3.1
  TOP w0.254: 64.6,70.6 64.25,70.25 ; 64.25,70.25 63.95,70.25 ; 64.25,70.25 65.15,70.25 ; 63.95,70.25 U6.7 ; 63.95,70.25 64.5,70.8
VCC_U5V: length 71.4
  TOP w0.254: C3.1 40.84,72.36 41.8,71.4 U4.1
  TOP w1.27: 30.3,70.4 30.3,55.8 33.8,52.3 59.3,52.3 63.3,56.3 67.73,56.3 69,55.03 69,47.6 68.04,46.64 U1.46
  vias: v1(29.8,77.1) v1(29.8,76.4) v1(29.8,75.7) v1(29.8,71.5) v1(29.8,70.8) v1(29.8,70.1) v1(30.6,77.1) v1(30.6,76.4) v1(30.6,75.7) v1(30.6,71.5) v1(30.6,70.8) v1(30.6,70.1) v1(40.5,75.9) v1(40.5,74.9) v1(41.3,75.9) v1(41.3,74.9) v1(55.1,74.9) v1(55.9,74.9) v1(56.7,75.9) v1(56.7,74.9)
VCC_VBAT: length 28.2
  TOP w0.254: 7.4,22.5 7.39,22.51 2.6,22.51
  TOP w0.508: 16.27,27.8 16.27,23.47 15.3,22.5 7.4,22.5 ; U1.33 3.45,13.65 1.9,15.2 1.9,21.81 2.6,22.51
18B20_DQ: length 15.1
  TOP w0.254: R22.1 R25.2 112.9,57.3 115.6,54.6 119.77,54.6 U8.2
485_A: length 28.4
  TOP w0.254: R18.1 100.4,62.94 104.59,62.94 105.96,64.31 105.96,65.86 106.72,66.62 U11.1 106.72,69.98 105.93,70.77 105.93,71.38 106.69,72.14 108.88,72.14 109.75,73.01 109.75,74.75 110,75 J2.3 ; R18.1 99.94,62.4 R26.2 ; R18.1 99.37,62.97 97.94,62.97 97.53,62.56 U10.6
485_B: length 27.7
  TOP w0.254: R18.2 99.36,63.42 97.94,63.42 97.53,63.83 U10.7 ; R18.2 99.94,64 R15.1 ; R18.2 100.46,63.4 104.4,63.4 105.5,64.5 105.5,65.8 104.68,66.62 U11.2 104.68,69.98 105.47,70.77 105.47,71.57 106.5,72.6 108.69,72.6 109.29,73.2 109.29,74.75 109.04,75 J2.4
ADC_BAT: length 175.7
  TOP w0.254: v1(12.5,11.4) R4.1 R1.2 15.44,9.8 15.54,9.7 D4.2 15.5,8.54 U1.38 ; TFT1.31 113.71,60.57 110.55,60.57 100.86,50.87 83.34,50.87 73.14,61.07 46.17,61.07 v1(43.9,58.8)
  BOTTOM w0.254: v1(12.5,11.4) 12.5,52.86 18.44,58.8 v1(43.9,58.8)
BAT_#CHG: length 40.6
  TOP w0.254: v1(30,80.5) 31.1,81.6 35.1,81.6 36.08,80.62 D3.2 ; U4.8 v1(51.2,70.4)
  BOTTOM w0.254: v1(30,80.5) 30.75,79.75 36.05,79.75 38.1,77.7 38.1,72.4 42.5,68 50.6,68 51.2,68.6 v1(51.2,70.4)
BAT_#PG: length 23.1
  TOP w0.254: D5.2 v1(31,80.5) ; v1(42.6,68.9) 43.1,69.4 U4.5
  BOTTOM w0.254: v1(42.6,68.9) 38.6,72.9 38.6,78.45 36.55,80.5 v1(31,80.5)
BOOT0: length 128.4
  TOP w0.254: U1.7 3.45,46.65 1.57,48.53 1.57,55.68 2.32,56.43 26.57,56.43 32.55,50.45 v1(62.6,50.45) ; v1(73.8,50.5) 73.8,44.7 75.9,42.6 R6.1
  BOTTOM w0.254: v1(73.8,50.5) 73.7,50.5 73.65,50.45 v1(62.6,50.45)
BOOT1: length 100.4
  TOP w0.254: U1.60 86.14,28.86 97.56,17.44 TFT1.10 ; v1(109.4,44.1) R7.2
  BOTTOM w0.254: v1(109.4,44.1) 109.4,33.6 103.3,27.5 68.31,27.5 U1.60
CAN_H: length 39.1
  TOP w0.254: J2.2 119.2,75 119.45,74.75 119.45,73 119.05,72.6 111.6,72.6 110.87,71.87 110.87,70.87 110.08,70.08 U13.2 110.08,66.72 110.81,65.99 110.81,65.11 101.93,56.23 101.17,56.23 100.64,56.76 R28.2 99.36,56.76 98.83,56.23 97.93,56.23 97.53,56.63 U12.7
CAN_L: length 39.9
  TOP w0.254: J2.1 120.16,75 119.91,74.75 119.91,72.81 119.24,72.14 111.79,72.14 111.33,71.68 111.33,70.77 112.12,69.98 U13.1 112.12,66.82 111.3,66 111.3,66 111.26,65.96 111.26,64.92 102.12,55.77 101.17,55.77 100.64,55.24 R28.1 99.36,55.24 98.83,55.77 98.3,55.77 98.3,55.77 97.94,55.77 97.53,55.36 U12.6
CAN_RX: length 109.2
  TOP w0.203: R35.1 34.29,73.9 34.86,73.33 35.67,73.33 36.5,72.5 36.5,58.7 38.35,56.86 60.31,56.86 61.91,58.46 69.64,58.46 71.8,56.3 71.8,42.1 69.81,40.11 68.04,40.11 U1.52
  TOP w0.254: v1(83.34,55.37) 83.72,55.74 84.86,55.74 86.5,54.1 R30.2
  BOTTOM w0.254: U1.52 67.99,40.06 77.51,40.06 79.86,42.41 79.86,53.56 82,55.7 83,55.7 v1(83.34,55.37)
CAN_TX: length 108.1
  TOP w0.203: U1.50 68.04,40.47 69.66,40.47 71.44,42.25 71.44,56.15 69.5,58.1 62.1,58.1 60.5,56.5 38.2,56.5 36.14,58.56 36.14,72.35 35.52,72.97 34.86,72.97 34.29,72.4 R34.1
  TOP w0.254: R27.2 86.54,57.84 84.9,56.2 83.72,56.2 v1(83.34,56.58)
  BOTTOM w0.254: v1(83.34,56.58) 82.92,56.16 81.81,56.16 79.4,53.75 79.4,42.6 77.32,40.52 67.99,40.52 U1.50
F_CS: length 56.4
  TOP w0.203: 45.3,46.7 42.8,46.7
  TOP w0.254: 42.8,46.7 42.4,47.1 42.4,48.1 42.91,48.6 44.04,48.6 ; 45.3,46.7 45.9,46.1 45.9,17.7 52.52,11.08 U1.73
GPS_PPS: length 189.9
  TOP w0.254: v1(16,65.9) v1(16,63) ; R38.1 117.94,18 v1(120.7,18)
  BOTTOM w0.254: v1(16,65.9) 58.3,65.9 71.9,79.5 98.9,79.5 100.24,78.16 100.24,70.11 101.05,69.3 106.74,69.3 112.96,63.08 112.96,54.39 114.39,52.96 118.99,52.96 119.76,52.19 119.76,24.8 120.71,23.84 120.71,18.01 v1(120.7,18) ; U1.1 3.45,56.65 9.8,63 v1(16,63)
IIC_SCL: length 54.2
  TOP w0.254: U1.3 3.38,51.72 2.03,53.07 2.03,55.49 2.51,55.97 9.13,55.97 11.8,53.3 U14.5 17.5,53.3 18,53.8 18,55.2 18.7,55.9 26.1,55.9 26.9,55.1 26.9,51.4 25.6,50.1 19.3,50.1 18.5,49.3 18.5,46.6 19.14,45.96 U7.6 23.5,45.96 R13.2
IIC_SDA: length 24.4
  TOP w0.254: U1.2 10.14,54.26 12.6,51.8 U14.6 16.4,50.3 17.7,49 17.7,46.1 19.1,44.7 20.79,44.7 U7.5 23.73,44.69 R14.2
KEY0: length 146.5
  TOP w0.254: SW2.3 91.6,6.5 SW2.4 ; v1(115.7,15.4) R36.1 ; v1(83.5,65.1) R24.2 87.64,66.2 v1(93.2,66.2)
  BOTTOM w0.254: v1(83.5,65.1) 76.83,58.43 76.83,50.63 75.38,49.18 U1.44 ; SW2.4 99.5,8.1 113.4,8.1 114.07,8.77 114.07,13.77 v1(115.7,15.4) 116.9,15.4 120.26,18.76 120.26,23.54 119.3,24.5 119.3,52 118.8,52.5 114.2,52.5 112.5,54.2 112.5,62.89 109.19,66.2 v1(93.2,66.2)
KEY1: length 137
  TOP w0.254: SW3.3 105.5,1.9 SW3.4 102.9,2 100.86,4.04 51.26,4.04 46.9,8.4 22.6,8.4 18.65,12.35 2.25,12.35 1.3,13.3 1.3,32.15 3.09,33.94 U1.17
LCD_CS: length 64.2
  BOTTOM w0.254: U1.39 61.45,51.3 61.45,14.15 63.25,12.35 79.85,12.35 82.32,9.88 TFT1.4
LCD_D0: length 104.8
  TOP w0.254: U1.34 18.88,13.62 23.5,9 47.05,9 51.55,4.5 101.2,4.5 102.64,5.94 TFT1.12
LCD_D1: length 45.4
  TOP w0.254: U1.62 86.08,26.32 96.29,16.11 96.29,8.91 96.9,8.3 98.7,8.3 TFT1.11
LCD_D3: length 50.2
  TOP w0.254: U1.69 64.41,16.19 62.7,17.9 62.7,21.6 63.61,22.51 64.94,22.51 65.68,23.25 65.68,24.38 66.35,25.05 85.25,25.05 95.02,15.28 TFT1.9
LCD_D4: length 37.4
  TOP w0.254: U1.65 65.04,21.24 66.31,22.51 85.59,22.51 92.48,15.62 TFT1.8
LCD_D5: length 33.6
  TOP w0.254: U1.67 64.41,18.71 65.67,19.97 85.33,19.97 89.94,15.36 TFT1.7
LCD_D6: length 48.3
  TOP w0.254: U1.55 64.41,33.91 62.1,31.6 62.1,13.5 63.25,12.35 84.75,12.35 TFT1.6
LCD_D7: length 91.7
  TOP w0.254: TFT1.5 83.23,11.33 69.93,11.33 68.41,9.81 50.69,9.81 30.37,30.13 4.72,30.13 U1.21
LCD_D8: length 70.4
  TOP w0.254: v1(73.8,53) 73.1,52.3 73.1,40.1 74.7,38.5 95.2,38.5 97.8,35.9 116.1,35.9 TFT1.26
  BOTTOM w0.254: U1.41 65.68,52.99 72.99,52.99 73,53 v1(73.8,53)
LCD_D9: length 64.8
  TOP w0.254: TFT1.25 97.36,35.14 94.75,37.75 66.42,37.75 65.68,38.49 65.68,47.91 U1.43
LCD_D10: length 75.9
  TOP w0.254: TFT1.24 117.9,32.6 119.8,30.7 119.8,24.8 118.71,23.71 102.59,23.71 93.63,32.67 66.42,32.67 65.68,31.93 65.68,25.05 U1.63
LCD_D11: length 59.6
  TOP w0.254: U1.56 93.86,33.94 101.55,26.25 118.75,26.25 119.3,26.8 119.3,28.6 117.88,30.02 TFT1.23
LCD_D12: length 54.6
  TOP w0.254: TFT1.22 102.78,27.52 94,36.3 67.13,36.3 U1.54
LCD_D13: length 60.3
  BOTTOM w0.254: U1.68 115.9,18.7 116.56,18.04 118.84,18.04 119.8,19 119.8,23.06 TFT1.21
LCD_D14: length 57.6
  BOTTOM w0.254: TFT1.20 119.3,21.02 119.3,19.2 118.6,18.5 116.9,18.5 114.16,21.24 U1.66
LCD_D15: length 52.5
  BOTTOM w0.254: TFT1.19 114,23.78 U1.64
LCD_RD: length 69.9
  TOP w0.254: v1(89.2,29.7) 105.18,13.72 TFT1.13 ; v1(75.38,51.72) 75.38,45.82 77,44.2 v1(89.2,44.2)
  BOTTOM w0.254: v1(89.2,44.2) v1(89.2,29.7) ; U1.42 v1(75.38,51.72)
LCD_RS: length 76.5
  TOP w0.254: v1(74.5,54.2) 74.5,45.4 76.4,43.5 v1(90,43.5) ; TFT1.15 110.26,13.74 92.8,31.2 v1(90,31.2)
  BOTTOM w0.254: v1(74.5,54.2) 74.44,54.26 U1.40 ; v1(90,43.5) v1(90,31.2)
LCD_RW: length 55
  TOP w0.254: v1(86.4,31.2) 88.9,31.2 107.72,12.38 TFT1.14
  BOTTOM w0.254: v1(86.4,31.2) 84.93,32.67 65.47,32.67 64.41,31.61 U1.57
LED0: length 134.5
  TOP w0.254: v1(63.3,30.1) 62.8,29.6 62.8,28 64.41,26.39 U1.61 ; v1(84.8,31.2) 85.5,31.9 93.2,31.9 103.93,21.17 120.97,21.17 124.9,25.1 124.9,28.1 123.72,29.28 D9.2 ; R17.2 v1(83.5,62.6)
  BOTTOM w0.254: v1(84.8,31.2) 83.73,30.13 63.33,30.13 v1(63.3,30.1) ; U1.61 64.41,26.39 62,28.8 62,46.9 63.01,47.91 75.81,47.91 77.29,49.39 77.29,56.39 v1(83.5,62.6)
LED1: length 174.2
  TOP w0.254: v1(14.2,62.3) v1(14.2,66.5) ; D10.2 v1(123.72,32.68)
  BOTTOM w0.254: U1.4 7.22,51.72 14.2,58.7 v1(14.2,62.3) ; v1(14.2,66.5) 14.23,66.53 58.29,66.53 71.71,79.96 99.09,79.96 100.7,78.35 100.7,70.3 101.24,69.76 106.93,69.76 113.41,63.27 113.41,62.89 113.41,54.58 114.58,53.41 119.18,53.41 120.3,52.29 120.3,36.1 v1(123.72,32.68)
NRF_CE: length 144.6
  BOTTOM w0.254: U3.3 92.53,74.57 91.36,75.74 87.94,75.74 75.3,63.1 63.9,63.1 62.1,64.9 10.2,64.9 1.3,56 1.3,55.62 1.3,18.7 2.57,17.43 4.77,17.43 5.99,16.21 U1.32
NRF_CS: length 163.2
  TOP w0.254: U1.72 86.38,13.62 88.67,11.33 88.67,6.13 89.8,5 100.8,5 101.37,5.57 101.37,10.87 102,11.5 103.4,11.5 103.91,10.99 103.91,8.69 104.4,8.2 113.6,8.2 114.07,8.67 114.07,11.1 116.84,13.87 R37.1 ; R21.2 v1(83.5,61.1) 82.8,61.8 82.8,65.3 91.26,73.76 91.26,75.74 U3.4
  BOTTOM w0.254: U1.72 66.95,13.75 65.81,14.89 63.71,14.89 62.1,16.5 62.1,23.7 63.45,25.05 65.15,25.05 65.68,25.58 65.68,26.85 64.94,27.59 63.86,27.59 62.6,28.85 62.6,44.2 63.77,45.37 76.37,45.37 77.74,46.74 77.74,55.34 v1(83.5,61.1)
NRF_IRQ: length 233.3
  TOP w0.254: R20.1 112.39,49.55 119.05,49.55 120.2,48.4 120.2,47.2 122.24,45.16 124.26,45.16 125.1,46 125.1,64.1 124.5,64.7 121.3,64.7 119.3,66.7 119.3,71.1 121.2,73 123.8,73 124.6,73.8 124.6,76.1 123.4,77.3 103.4,77.3 101.46,75.36 R5.1 99.96,68.5 v1(89.6,68.5)
  BOTTOM w0.254: U1.30 5.99,18.71 4.73,19.97 2.33,19.97 1.76,20.54 1.76,55.81 10.35,64.4 61.9,64.4 63.7,62.6 75.6,62.6 81.5,68.5 v1(89.6,68.5)
REMOTE_IN: length 16.8
  TOP w0.254: U9.1 121.1,48.56 121.1,51.3 120.2,52.2 113.8,52.2 113.2,52.8 R23.2 R20.2
RESET: length 109.4
  TOP w0.254: U1.14 4.72,37.75 4.72,33.22 4.17,32.67 2.77,32.67 2,31.9 2,25.7 2.65,25.05 11.05,25.05 14.9,28.9 17.3,28.9 18,28.2 18,17.3 24.9,10.4 47.3,10.4 50.5,7.2 74.9,7.2 77.24,9.54 TFT1.2
SD_CS: length 36.4
  TOP w0.254: U1.75 50.46,8.54 48,11 35.1,11 34.56,11.54 U26.2 34.56,14.66 35.4,15.5 R40.1
SPI1_MISO: length 137.3
  TOP w0.203: 48.1,45.6 48.28,45.42 53.9,45.42
  TOP w0.254: 48.1,45.6 46.37,47.34 46.34,47.34 ; 46.34,47.34 v1(46.35,47.35) ; 46.34,47.34 U5.2 ; U1.51 58.01,45.42 53.9,45.42 ; U26.7 v1(29.06,14.6) 29.06,16.4 R42.2
  BOTTOM w0.254: U1.51 64.41,38.99 65.65,37.75 83.15,37.75 87.6,42.2 87.6,63.3 97.61,73.31 U3.7 ; v1(46.35,47.35) 46.35,18.05 44.1,15.8 30.3,15.8 29.1,14.6 v1(29.06,14.6)
SPI1_MOSI: length 140.1
  TOP w0.254: U1.53 56.09,44.8 53.7,44.8 ; 53.7,44.8 v1(53.7,44.8) ; 53.7,44.8 U5.5 ; R39.1 33.9,15.04 v1(33.46,14.6) U26.3
  BOTTOM w0.254: U3.6 96.56,78.5 98.3,78.5 99,77.8 99,73.7 88.4,63.1 88.4,42.35 81.26,35.21 65.69,35.21 64.42,36.48 U1.53 ; v1(53.7,44.8) 53.7,18.2 50.1,14.6 v1(33.46,14.6)
SPI1_SCK: length 119.7
  TOP w0.254: U1.49 59.87,46.1 v1(53.7,46.1) 53.66,46.06 51.96,46.06 ; U26.5 v1(31.26,14.6)
  BOTTOM w0.254: v1(53.7,46.1) 53,45.4 53,18.15 50.09,15.23 31.89,15.23 v1(31.26,14.6) ; U1.49 64.41,41.61 65.63,42.83 77.13,42.83 78.2,43.9 78.2,54.8 95.07,71.67 U3.5
T_CS: length 159.2
  TOP w0.254: v1(43.9,59.9) 45.53,61.53 73.33,61.53 83.53,51.33 100.67,51.33 110.36,61.02 115.8,61.02 TFT1.32
  BOTTOM w0.254: v1(43.9,59.9) 44.7,60.7 44.7,63.35 44.35,63.7 20.75,63.7 10.44,53.39 10.44,28.2 9.83,27.59 4.79,27.59 3.52,26.32 U1.23
T_MISO: length 170.9
  TOP w0.254: TFT1.35 114.61,66.56 100.29,52.24 83.91,52.24 73.71,62.44 44.44,62.44 v1(43.9,61.9)
  BOTTOM w0.254: v1(43.9,61.9) 20.25,61.9 11.36,53.01 11.36,12.11 9.06,9.81 4.79,9.81 3.52,11.08 U1.35
T_MOSI: length 169.9
  TOP w0.254: TFT1.33 110.17,61.48 100.48,51.79 83.72,51.79 73.52,61.99 44.99,61.99 v1(43.9,60.9)
  BOTTOM w0.254: U1.37 3.46,8.54 4.8,7.2 7.2,7.2 11.81,11.81 11.81,52.82 19.89,60.9 v1(43.9,60.9)
T_PEN: length 168.3
  TOP w0.254: TFT1.36 116.5,69.1 100.1,52.7 84.1,52.7 73.9,62.9 v1(43.9,62.9)
  BOTTOM w0.254: v1(43.9,62.9) 20.6,62.9 10.9,53.2 10.9,12.3 9.68,11.08 U1.36
WK_UP: length 197
  TOP w0.254: v1(108.7,4.8) 116,4.8 118.2,7 124.3,7 125.6,8.3 125.6,44.1 125,44.7 121.3,44.7 118.99,47.01 108.29,47.01 106.6,48.7 106.6,55.9 109.5,58.8 R22.2 ; SW1.4 77.7,6.6 SW1.3 50,6.7 46.9,9.8 24,9.8 12.56,21.24 U1.28
  BOTTOM w0.254: SW1.4 85.8,4.8 v1(108.7,4.8)
N16760053: length 18.2
  TOP w0.254: R29.2 119,39.6 119.8,38.8 119.8,37 120.8,36 120.8,30.18 D9.1
N16760057: length 17.7
  TOP w0.254: D10.1 121.68,35.82 120.3,37.2 120.3,39.7 119.5,40.5 112.76,40.5 R31.2
N16760125: length 19.9
  TOP w0.254: D11.1 120.3,28.68 120.3,35.8 119.3,36.8 119.3,38.3 118.5,39.1 113.16,39.1 R32.2
N16761108: length 8
  TOP w0.254: U3.8 99.94,74.68 R5.2
N16762865: length 7.4
  TOP w0.254: U10.3 88.1,62.56 R17.1 88.06,63.56 88.33,63.83 U10.2
N16769643: length 15.5
  TOP w0.203: R34.2 31.52,73.02 29.72,73.02 29.27,72.56 U25.1 U25.6 25.18,72.56 24.7,73.04 23.75,73.04 23.26,73.54 23.26,76.7 23.11,76.84 USB1.3
  TOP w0.254: R33.2 R34.2
N16774261: length 3.1
  TOP w0.254: U12.1 R27.1
N16774305: length 3.1
  TOP w0.254: U12.4 88.07,54.09 R30.1
N16775020: length 3.1
  TOP w0.254: U10.1 R24.1
N16775096: length 3.2
  TOP w0.254: R21.1 88.25,61.29 U10.4
N16776719: length 4.3
  TOP w0.254: U4.7 50.6,69.9 50.9,69.6 R10.1
N16776893: length 4.1
  TOP w0.203: R8.1 40.76,70.9 U4.2
N16776901: length 4.2
  TOP w0.203: U4.4 40.86,69.9 R9.1
N16777207: length 2.5
  TOP w0.254: R3.1 34.32,80.48 D5.1
N16777228: length 1.9
  TOP w0.254: D3.1 38.12,78.95 R2.1
N16778010: length 4.1
  TOP w0.254: 61.5,68.6 59,68.6 57.94,69.66 R16.1 ; U6.4 61.85,69.15
N16778038: length 2.1
  TOP w0.254: R12.2 61.85,72.79 U6.1
N16778054: length 2.7
  TOP w0.254: 64.8,69.5 64.55,69.75 64.25,69.75 ; U6.6 63.95,69.75 ; 63.95,69.75 64.4,69.3 ; 63.95,69.75 64.25,69.75 ; 64.25,69.75 64.6,69.4
N16778074: length 4.3
  TOP w0.254: U6.2 61.25,70.25 60.3,71.2 R19.1 R16.2
N16781181: length 10.9
  TOP w0.254: U15.4 124.5,14.88 124.5,16.4 123.7,17.2 122.5,17.2 120.7,15.4 R36.2
N16781184: length 5.5
  TOP w0.254: U15.3 120.98,13.9 R37.2
N16781187: length 5.3
  TOP w0.254: R38.2 121.44,16.9 U15.2
N16789003: length 13.4
  TOP w0.203: R35.2 31.62,73.38 29.72,73.38 29.27,73.83 U25.3 U25.4 25.14,73.83 24.7,73.4 23.9,73.4 23.61,73.69 23.61,76.7 23.76,76.84 USB1.2
N16789326: length 3.6
  TOP w0.254: R43.2 27.6,15.1 27.96,14.74 U26.8
N16789342: length 4
  TOP w0.254: R41.1 36.9,15.5 35.66,14.26 U26.1
N167502100: length 6
  TOP w0.508: D2.1 19.83,27.9 U2.1
N167508310: length 13.7
  TOP w0.254: R7.1 114.63,41.63 123.07,41.63 124.24,40.46 J1.4
N167508315: length 10.5
  TOP w0.254: R6.2 113.66,41.1 120.96,41.1 J1.3

## Copper pours and planes (outline as drawn; the poured copper is in the pictures)
GND on BOTTOM: 0.1,79.2 1.04,81.46 3.3,82.4 123,82.4 125.25,81.45 126.2,79.2 126.2,3.3 125.23,1.07 123,0.1 3.3,0.1 1.05,1.05 0.1,3.3 ; 37 cut-outs
VBAT on TOP (solid shape): 47.62,80.63 47.65,80.5 47.62,80.37 46.89,79.63 45.94,80.5 46.89,81.37
VBAT on TOP (solid shape): 47.32,81.45 47.53,81.31 47.51,81.05 46.43,79.97 45.94,80.47 45.11,81.39
VBAT on TOP (solid shape): 47.61,79.95 47.63,79.69 47.42,79.55 45.11,79.61 45.94,80.53 46.48,81.08
VBAT on TOP: 48.4,71.3 48.4,72.2 48.6,72.4 51.7,72.4 52.2,72.9 52.2,78.2 50.8,79.6 45.1,79.6 45.1,81.4 61.3,81.4 62.2,80.5 62.2,77.3 61.1,77.3 61.1,78.8 60.3,79.6 55.1,79.6 53.8,78.3 53.8,71.5 53.6,71.3
VCC_3V3 on TOP (solid shape): 77.66,2.1 76.82,1.32 76.22,1.92 76.15,2.1 76.22,2.28 76.82,2.88
VCC_3V3 on TOP (solid shape): 78.98,2.28 79.05,2.1 78.98,1.92 78.38,1.32 77.54,2.1 78.38,2.88
VCC_3V3 on TOP (solid shape): 84.06,2.1 83.22,1.32 82.62,1.92 82.55,2.1 82.62,2.28 83.22,2.88
VCC_3V3 on TOP: 6.9,35.2 23,35.2 23.7,35.9 23.7,37.3 23.2,37.8 7,37.8 6.4,37.2 6.4,35.7
VCC_3V3 on TOP: 111,57.7 109.2,57.7 108.1,56.6 108.1,55.6 108.3,55.4 108.9,55.4 110.4,56.9 111.1,56.9 111.1,57.6
VCC_3V3 on TOP: 77.3,64.8 77.3,61.3 79.8,58.8 102,58.8 102.6,59.4 102.6,61.2 102.4,61.4 101.1,61.4 100.4,60.7 80.6,60.7 78.9,62.4 78.9,64.8
VCC_3V3 on TOP: 111.1,53.3 110,53.3 109.5,53.8 108.4,53.8 108.1,53.5 108.1,52.5 108.4,52.2 111,52.2 111.1,52.3
VCC_3V3 on BOTTOM: 56,62.9 78.7,62.9 79,62.6 79,61.3 77.1,59.4 56.3,59.4 51.4,54.5 25.5,54.5 23.7,52.7 23.7,36.1 23.1,35.5 21.7,35.5 21.1,36.1 21.1,54.5 23.2,56.6 49.7,56.6
VCC_3V3 on BOTTOM: 99.2,60 108.7,60 109.8,58.9 109.8,52.6 109.4,52.2 108.5,52.2 108.1,52.6 108.1,57.9 107.2,58.8 99.3,58.8 99,59.1 99,59.8
VCC_DCDC on TOP: 54.8,78.4 56,78.4 56.5,78.9 59.9,78.9 60.5,78.3 60.5,77.1 60.8,76.8 66.3,76.8 67,76.1 67,69.6 65.6,69.6 65.1,70.1 62.9,70.1 62.9,70.4 64.2,70.4 64.4,70.6 64.4,72.1 64.2,72.3 62.9,72.3 62.9,74.5 62.3,75.1 59.9,75.1 59.2,75.8 59.2,76.7 58.6,77.3 55,77.3 54.8,77.5
VCC_U5V on TOP: 54.8,74.5 54.8,76.5 57.2,76.5 57.5,76.8 58.5,76.8 58.5,72.3 57.4,72.3 57.4,73.7 56.6,74.5
VCC_U5V on TOP: 30.9,69.7 29.8,69.7 29.3,70.2 29.3,71.5 29.7,71.9 30.9,71.9 31.1,71.7 31.1,69.9
VCC_U5V on TOP: 24.2,78.6 30.6,78.6 31.7,77.5 40.2,77.5 41.6,76.1 41.6,73.6 43,72.2 45.2,72.2 45.4,72 45.4,71.2 42,71.2 41.1,72.1 40.1,72.1 40.1,74.7 39.3,75.5 25.7,75.5 24.2,77
VCC_U5V on BOTTOM: 31.1,69.9 31.1,77.1 30.7,77.5 29.7,77.5 29.3,77.1 29.3,70.2 29.8,69.7 30.9,69.7
VCC_U5V on BOTTOM: 40.1,74.8 40.1,76.1 40.4,76.4 56.9,76.4 57.2,76.1 57.2,74.8 56.9,74.5 40.4,74.5
(no net) on TOP: 0.1,79.2 1.04,81.46 3.3,82.4 123,82.4 125.25,81.45 126.2,79.2 126.2,3.3 125.23,1.07 123,0.1 3.3,0.1 1.05,1.05 0.1,3.3 ; 67 cut-outs
BAT_#CHG on TOP (solid shape): 36.59,81.11 36.1,80.48 35.58,79.89 35.45,81.12 35.49,81.21 35.58,81.25
GPS_PPS on BOTTOM (solid shape): 3.37,55.88 3.45,55.91 3.53,55.88 4.26,55.15 3.45,54.23 2.64,55.15
KEY0 on TOP (solid shape): 97.93,6.5 97.12,5.72 96.43,6.41 96.4,6.5 96.43,6.59 97.12,7.28
KEY0 on TOP (solid shape): 93.07,6.59 93.1,6.49 93.05,6.4 92.26,5.81 91.47,6.6 92.28,7.38
KEY0 on BOTTOM (solid shape): 98.87,7.6 98.96,7.56 99,7.47 99,6.5 97.88,6.48 97.9,7.6
KEY1 on TOP (solid shape): 105.43,2 104.62,1.22 103.93,1.91 103.9,2 103.93,2.09 104.62,2.78
KEY1 on TOP (solid shape): 111.83,1.9 111.02,1.12 110.33,1.81 110.3,1.9 110.33,1.99 111.02,2.68
KEY1 on TOP (solid shape): 106.97,1.99 107,1.89 106.95,1.8 106.16,1.21 105.37,2 106.18,2.78
LED0 on TOP (solid shape): 124.44,28.7 124.4,28.6 124.31,28.56 123.21,28.69 123.69,29.32 124.22,29.91
WK_UP on TOP (solid shape): 77.63,6.7 76.82,5.92 76.13,6.61 76.1,6.7 76.13,6.79 76.82,7.48
WK_UP on TOP (solid shape): 84.03,6.6 83.22,5.82 82.53,6.51 82.5,6.6 82.53,6.69 83.22,7.38
WK_UP on TOP (solid shape): 79.17,6.69 79.2,6.59 79.15,6.5 78.36,5.91 77.57,6.7 78.38,7.48
WK_UP on BOTTOM (solid shape): 85.1,6.6 85.1,5.63 85.06,5.54 84.97,5.5 84,5.5 83.98,6.62
N16760053 on TOP (solid shape): 122.19,29.91 121.71,29.28 121.18,28.69 120.95,29.9 120.98,30 121.07,30.04
N16760125 on TOP (solid shape): 122.19,27.91 121.71,27.28 121.18,26.69 120.95,27.9 120.98,28 121.07,28.04
N16777207 on TOP (solid shape): 34.34,80.52 34.82,79.89 33.73,79.76 33.64,79.8 33.6,79.9 33.81,81.11
N16778010 on TOP: 61.3,69.4 61.3,63.2 74.8,63.2 74.8,64.7 63.4,64.7 62.9,65.2 62.9,68 62.3,68.6 62.3,69.4
N16778054 on TOP: 69.6,67.1 65.2,67.1 64.3,68 64.3,69.3 64.1,69.5 64.1,69.9 64.9,69.9 66.2,68.6 69.6,68.6
GND on TOP (solid shape): 4.53,31.58 4.6,31.4 4.53,31.22 4.08,30.77 3.39,31.4 4.08,32.03
GND on TOP (solid shape): 6.05,31.4 5.36,30.77 4.91,31.22 4.84,31.4 4.91,31.58 5.36,32.03
GND on TOP (solid shape): 7.07,31.58 7.14,31.4 7.07,31.22 6.62,30.77 5.93,31.4 6.62,32.03
GND on TOP (solid shape): 7.07,29.04 7.14,28.86 7.07,28.68 6.62,28.23 5.93,28.86 6.62,29.49
GND on TOP (solid shape): 64.47,44.1 63.78,43.47 63.33,43.92 63.26,44.1 63.33,44.28 63.78,44.73
GND on TOP (solid shape): 68.03,31.58 68.1,31.4 68.03,31.22 67.58,30.77 66.89,31.4 67.58,32.03
GND on TOP (solid shape): 63.52,45.02 63.64,45.24 63.88,45.26 64.52,44.97 64.45,44.05 63.52,44.1
GND on BOTTOM (solid shape): 7.07,46.82 7.14,46.64 7.07,46.46 6.62,46.01 5.93,46.64 6.62,47.27
GND on BOTTOM (solid shape): 68.03,31.58 68.1,31.4 68.03,31.22 67.58,30.77 66.89,31.4 67.58,32.03
GND on BOTTOM (solid shape): 122.33,37.19 121.88,36.74 121.7,36.67 121.52,36.74 121.07,37.19 121.7,37.88
GND on BOTTOM (solid shape): 124.28,49.18 124.35,49 124.28,48.82 123.83,48.37 123.14,49 123.83,49.63
GND on BOTTOM (solid shape): 123.76,50.08 123.99,50.04 124.09,49.84 124.09,49 123.16,48.95 123.12,49.88
VBAT on TOP (solid shape): 36.98,78.25 36.95,78.16 36.86,78.12 35.88,78.24 36.31,78.72 36.8,79.16
VCC_3V3 on TOP (solid shape): 20.79,25.24 20.83,25.1 20.79,24.96 20.13,24.4 19.66,25.1 20.13,25.8
VCC_3V3 on TOP (solid shape): 25.82,46.76 25.4,46.27 24.9,45.84 24.68,46.75 24.74,46.9 24.88,46.96
VCC_3V3 on TOP (solid shape): 32.85,17.22 33,17.16 33.06,17.02 32.86,16.08 32.37,16.5 31.94,17
VCC_3V3 on TOP (solid shape): 112.2,54.33 112.62,53.84 111.68,53.64 111.54,53.7 111.48,53.85 111.7,54.76
VCC_3V3 on TOP (solid shape): 112.62,56.26 112.2,55.77 111.7,55.34 111.48,56.25 111.54,56.4 111.68,56.46
VCC_3V3 on TOP (solid shape): 7.07,36.66 7.14,36.48 7.07,36.3 6.62,35.85 5.93,36.48 6.62,37.11
VCC_3V3 on TOP (solid shape): 32.86,17 32.45,16.49 31.94,16.08 31.65,16.98 31.72,17.17 31.91,17.25
VCC_3V3 on TOP (solid shape): 79.05,75.59 79.23,75.66 79.41,75.59 79.91,75.1 79.23,74.36 78.56,75.1
VCC_3V3 on TOP (solid shape): 79.31,70.05 79.72,69.54 78.82,69.25 78.63,69.32 78.55,69.51 78.8,70.46
VCC_3V3 on TOP (solid shape): 79.91,76.29 79.41,75.79 79.23,75.72 79.05,75.79 78.56,76.29 79.23,77.03
VCC_3V3 on TOP (solid shape): 79.91,73.75 79.41,73.25 79.23,73.18 79.05,73.25 78.56,73.75 79.23,74.49
VCC_3V3 on TOP (solid shape): 84.99,73.75 84.49,73.25 84.31,73.18 84.13,73.25 83.64,73.75 84.31,74.49
VCC_3V3 on TOP (solid shape): 85.48,74.6 85.55,74.42 85.48,74.24 84.99,73.75 84.25,74.42 84.99,75.1
VCC_3V3 on TOP (solid shape): 90.06,77.01 89.37,76.38 88.91,76.82 88.83,77 88.91,77.18 89.36,77.64
VCC_3V3 on TOP (solid shape): 97.32,65.8 97.52,65.74 97.6,65.55 97.35,64.8 96.38,64.97 95.85,65.4
VCC_3V3 on TOP (solid shape): 122.78,43.08 122.85,42.9 122.78,42.72 122.33,42.27 121.64,42.9 122.33,43.53
VCC_3V3 on TOP (solid shape): 124.3,42.9 123.61,42.27 123.16,42.72 123.09,42.9 123.16,43.08 123.61,43.53
VCC_3V3 on TOP (solid shape): 26.47,46.2 26.49,45.96 26.3,45.81 24.9,45.84 25.3,46.32 25.82,46.76
VCC_3V3 on TOP (solid shape): 89.18,55.5 89.19,55.26 89,55.11 87.6,55.14 88,55.62 88.52,56.06
VCC_3V3 on BOTTOM (solid shape): 121.52,43.98 121.7,44.05 121.88,43.98 122.33,43.53 121.7,42.84 121.07,43.53
VCC_5V on TOP (solid shape): 7.11,34.08 7.18,33.89 7.09,33.71 6.6,33.3 5.93,33.94 6.62,34.57
VCC_5V on TOP (solid shape): 118.41,12.45 118.82,11.94 117.92,11.65 117.73,11.72 117.65,11.91 117.9,12.86
VCC_5V on TOP (solid shape): 116.33,10.59 116.55,10.46 116.56,10.21 116.2,9.57 115.29,9.67 115.34,10.59
VCC_5V on BOTTOM (solid shape): 115.97,9.07 115.52,8.62 115.34,8.55 115.16,8.62 114.71,9.07 115.34,9.76
ADC_BAT on TOP (solid shape): 7.16,8.63 7.19,8.54 7.16,8.45 6.62,7.91 5.96,8.54 6.62,9.17
BAT_#PG on TOP (solid shape): 32.32,80.5 31.78,79.89 31.19,80.42 31.17,80.5 31.19,80.58 31.78,81.11
BOOT1 on TOP (solid shape): 68.12,28.95 68.15,28.86 68.12,28.77 67.58,28.23 66.92,28.86 67.58,29.49
BOOT1 on TOP (solid shape): 97.47,10.87 97.56,10.9 97.65,10.87 98.19,10.33 97.56,9.67 96.93,10.33
CAN_RX on TOP (solid shape): 87,54.56 86.56,54.08 86.08,53.64 85.92,54.55 85.96,54.65 86.05,54.68
CAN_TX on TOP (solid shape): 86.56,57.92 87,57.44 86.09,57.25 85.99,57.29 85.95,57.38 86.08,58.36
F_CS on TOP (solid shape): 64.44,11.08 63.78,10.45 63.24,10.99 63.21,11.08 63.24,11.17 63.78,11.71
IIC_SCL on TOP (solid shape): 23.87,46.31 24.3,45.84 22.74,45.83 22.63,45.91 22.65,46.04 23.38,46.76
IIC_SDA on TOP (solid shape): 7.16,54.35 7.19,54.26 7.16,54.17 6.62,53.63 5.96,54.26 6.62,54.89
KEY0 on BOTTOM (solid shape): 68.12,49.27 68.15,49.18 68.12,49.09 67.58,48.55 66.92,49.18 67.58,49.81
KEY1 on TOP (solid shape): 3.48,33.96 3.45,33.05 2.33,33.05 2.22,33.11 2.22,33.23 2.57,33.99
LCD_CS on BOTTOM (solid shape): 81.43,10.64 81.48,10.74 81.59,10.77 82.35,10.59 82.34,9.68 81.43,9.7
LCD_D0 on TOP (solid shape): 7.16,13.71 7.19,13.62 7.16,13.53 6.62,12.99 5.96,13.62 6.62,14.25
LCD_D0 on TOP (solid shape): 103.27,9.07 102.73,8.53 102.64,8.5 102.55,8.53 102.01,9.07 102.64,9.73
LCD_D1 on TOP (solid shape): 68.12,26.41 68.15,26.32 68.12,26.23 67.58,25.69 66.92,26.32 67.58,26.95
LCD_D3 on TOP (solid shape): 94.93,10.87 95.02,10.9 95.11,10.87 95.65,10.33 95.02,9.67 94.39,10.33
LCD_D4 on TOP (solid shape): 92.39,10.87 92.48,10.9 92.57,10.87 93.11,10.33 92.48,9.67 91.85,10.33
LCD_D4 on TOP (solid shape): 65.72,22.05 65.83,21.97 65.82,21.84 65.26,21.17 64.38,21.23 64.49,22.04
LCD_D5 on TOP (solid shape): 89.85,10.87 89.94,10.9 90.03,10.87 90.57,10.33 89.94,9.67 89.31,10.33
LCD_D9 on TOP (solid shape): 117.91,35.14 117.25,34.51 116.71,35.05 116.68,35.14 116.71,35.23 117.25,35.77
LCD_D11 on TOP (solid shape): 68.12,34.03 68.15,33.94 68.12,33.85 67.58,33.31 66.92,33.94 67.58,34.57
LCD_D12 on TOP (solid shape): 117.91,27.52 117.25,26.89 116.71,27.43 116.68,27.52 116.71,27.61 117.25,28.15
LCD_D12 on TOP (solid shape): 68.3,36.39 68.33,36.28 68.26,36.19 67.55,35.83 66.92,36.48 67.58,37.11
LCD_D13 on BOTTOM (solid shape): 68.12,18.79 68.15,18.7 68.12,18.61 67.58,18.07 66.92,18.7 67.58,19.33
LCD_D14 on BOTTOM (solid shape): 68.12,21.33 68.15,21.24 68.12,21.15 67.58,20.61 66.92,21.24 67.58,21.87
LCD_D15 on BOTTOM (solid shape): 68.12,23.87 68.15,23.78 68.12,23.69 67.58,23.15 66.92,23.78 67.58,24.41
LCD_RD on TOP (solid shape): 105.09,10.87 105.18,10.9 105.27,10.87 105.81,10.33 105.18,9.67 104.55,10.33
LCD_RD on BOTTOM (solid shape): 68.12,51.81 68.15,51.72 68.12,51.63 67.58,51.09 66.92,51.72 67.58,52.35
LCD_RS on TOP (solid shape): 110.17,10.87 110.26,10.9 110.35,10.87 110.89,10.33 110.26,9.67 109.63,10.33
LCD_RS on BOTTOM (solid shape): 68.12,54.35 68.15,54.26 68.12,54.17 67.58,53.63 66.92,54.26 67.58,54.89
LCD_RW on TOP (solid shape): 107.63,10.87 107.72,10.9 107.81,10.87 108.35,10.33 107.72,9.67 107.09,10.33
LCD_RW on BOTTOM (solid shape): 65.14,32.49 65.25,32.47 65.3,32.37 65.3,31.4 64.39,31.38 64.38,32.28
LED1 on TOP (solid shape): 123.64,32.39 123.72,32.42 123.79,32.39 124.22,31.91 123.72,31.27 123.21,31.91
LED1 on BOTTOM (solid shape): 7.16,51.81 7.19,51.72 7.16,51.63 6.62,51.09 5.96,51.72 6.62,52.35
NRF_CS on TOP (solid shape): 68.12,13.71 68.15,13.62 68.12,13.53 67.58,12.99 66.92,13.62 67.58,14.25
NRF_CS on TOP (solid shape): 116.86,13.92 117.3,13.44 116.39,13.28 116.29,13.32 116.25,13.41 116.38,14.36
SD_CS on TOP (solid shape): 64.44,8.54 63.78,7.91 63.24,8.45 63.21,8.54 63.24,8.63 63.78,9.17
SPI1_MISO on BOTTOM (solid shape): 98.24,73.84 97.7,73.3 97.61,73.26 97.52,73.3 96.98,73.84 97.61,74.5
SPI1_SCK on BOTTOM (solid shape): 95.7,73.84 95.16,73.3 95.07,73.26 94.98,73.3 94.44,73.84 95.07,74.5
T_MISO on TOP (solid shape): 117.91,66.56 117.25,65.93 116.71,66.47 116.68,66.56 116.71,66.65 117.25,67.19
T_MOSI on TOP (solid shape): 117.91,61.48 117.25,60.85 116.71,61.39 116.68,61.48 116.71,61.57 117.25,62.11
T_PEN on TOP (solid shape): 117.91,69.1 117.25,68.47 116.71,69.01 116.68,69.1 116.71,69.19 117.25,69.73
T_PEN on BOTTOM (solid shape): 7.16,11.17 7.19,11.08 7.16,10.99 6.62,10.45 5.96,11.08 6.62,11.71
WK_UP on TOP (solid shape): 7.16,21.33 7.19,21.24 7.16,21.15 6.62,20.61 5.96,21.24 6.62,21.87
N16760057 on TOP (solid shape): 121.61,32.39 121.68,32.42 121.76,32.39 122.19,31.91 121.68,31.27 121.18,31.91
N16775096 on TOP (solid shape): 89.1,61.4 89.16,61.32 89.14,61.21 88.52,60.64 88.03,61.09 88.52,61.56
N16776893 on TOP (solid shape): 41.65,70.97 41.67,70.88 41.62,70.81 41.02,70.64 40.54,71.1 41.02,71.56
N16776901 on TOP (solid shape): 41.68,70 41.75,69.93 41.73,69.83 41.02,69.14 40.54,69.59 41.02,70.06
N16777228 on TOP (solid shape): 38.62,79.89 38.19,79.41 38.12,79.38 38.04,79.41 37.61,79.89 38.12,80.53
N16777228 on TOP (solid shape): 38.04,79.84 38.15,79.86 38.24,79.78 38.32,79.16 37.85,78.67 37.4,79.16
N16778010 on TOP (solid shape): 58.52,69.2 58.48,69.11 58.39,69.08 57.48,69.24 57.92,69.72 58.4,70.16
N167502100 on TOP (solid shape): 20.86,28.07 20.93,27.92 20.88,27.76 20.13,27.1 19.66,27.79 20.13,28.5

Small or netless copper shapes (teardrops, artwork), in the pictures only: 252 on TOP, 69 on BOTTOM

## Text on the board
Ref Des/Silkscreen Bottom: NAME:MB1136_BOOSTPACK_V10A.BRD | DATE:2017_02_20 | BY:XXXLZJXXX | BOOT0 | VCC | GND | BOOT1
User.Comments: CR_RS485_3 | CR_RS485_4 | CR_RS485_2
Ref Des/Silkscreen Top: PG | CHG | NAME:MB1136_BOOSTPACK_V10A.BRD | DATE:2017_02_20 | BY:XXXLZJXXX | WK_UP | KEY0 | KEY1 | B | A | H | L
DEVICE_TYPE_TOP: FIGURE | SIZE | 0.3048 | 0.4572 | 0.889 | 0.9652 | 1.016 | 1.2 | 2.032 | 3.4036 | DRILL CHART: TOP to BOTTOM | ALL UNITS ARE IN MILLIMETERS | PLATED | QTY | 488 | 5 | 135 | 8 | 6 | 12 | 4
